# EAGLE board DA16200_Thing_Plus-Panel (EAGLE 9.6.2), part 1 of 6
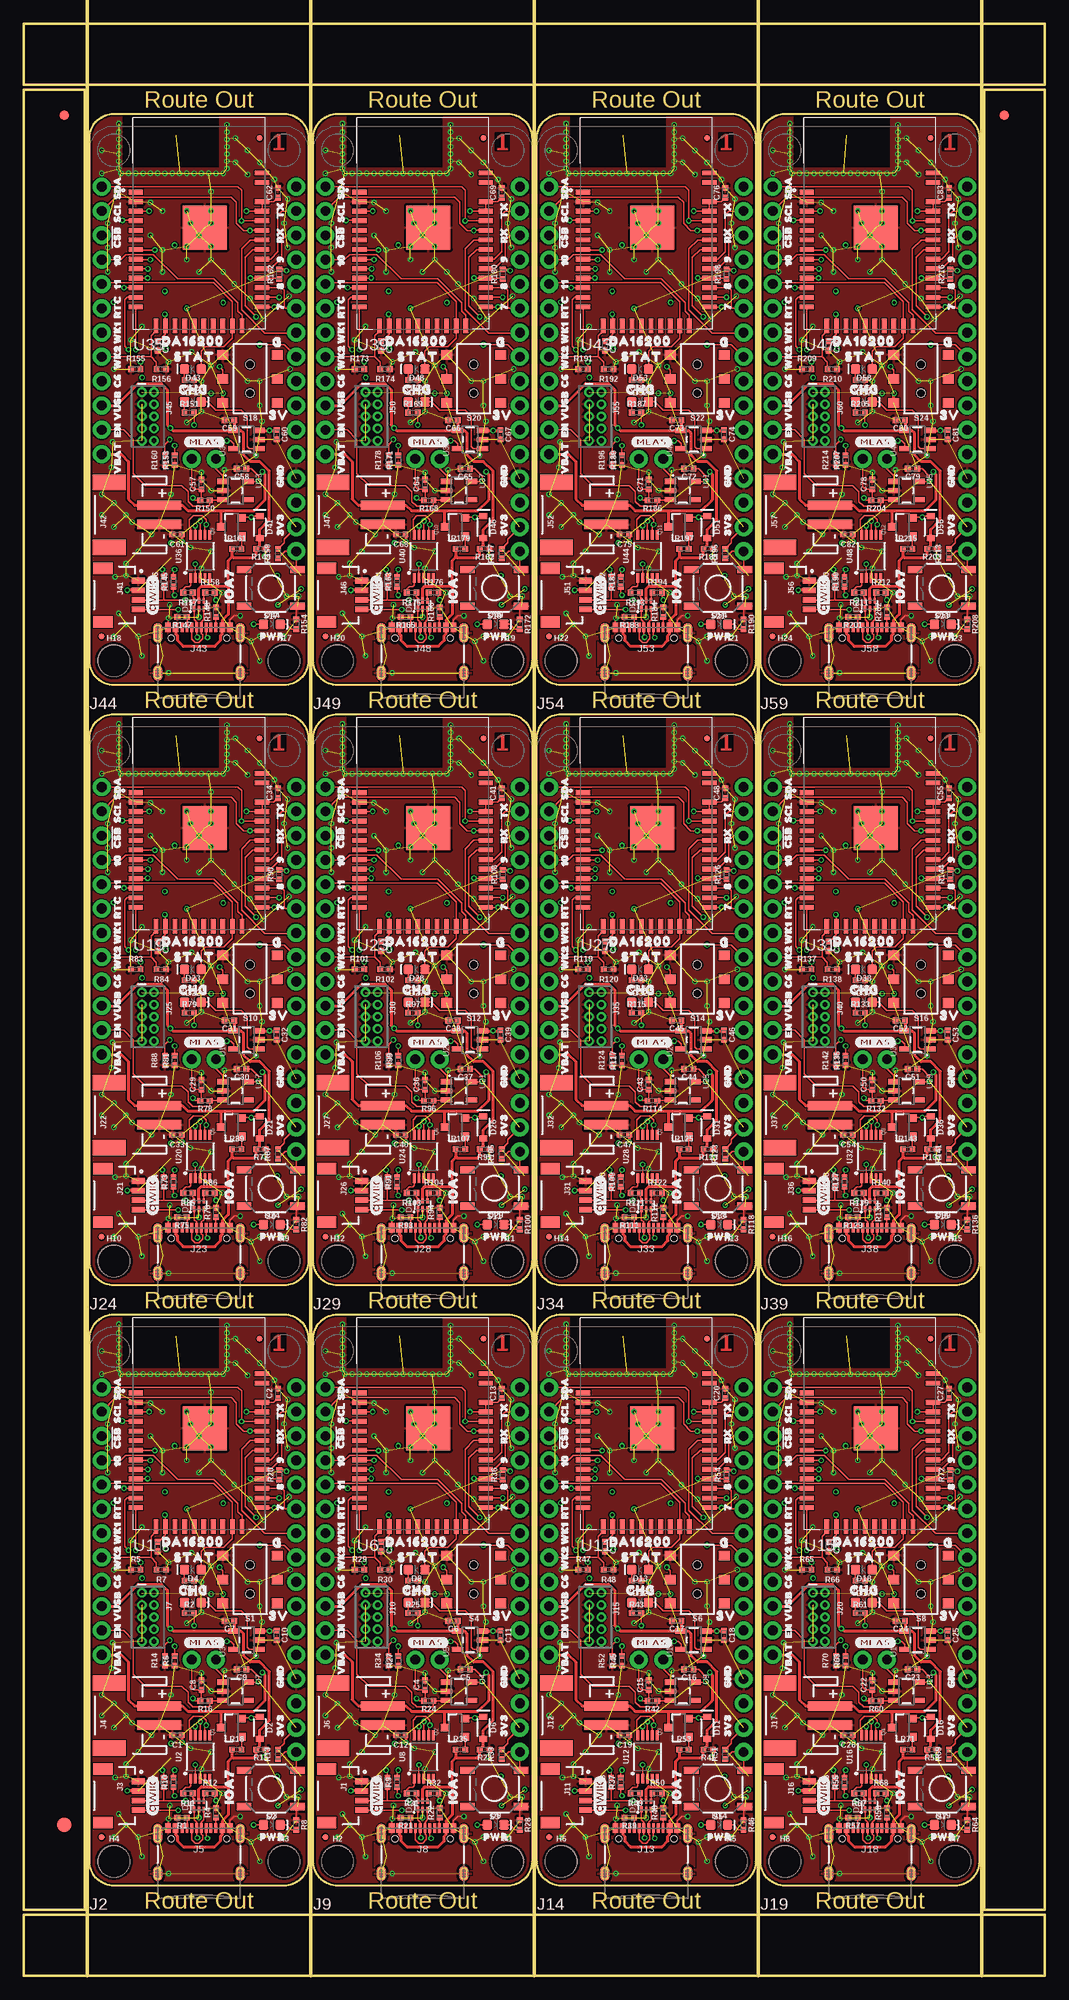
[diagram p0: board, top side]
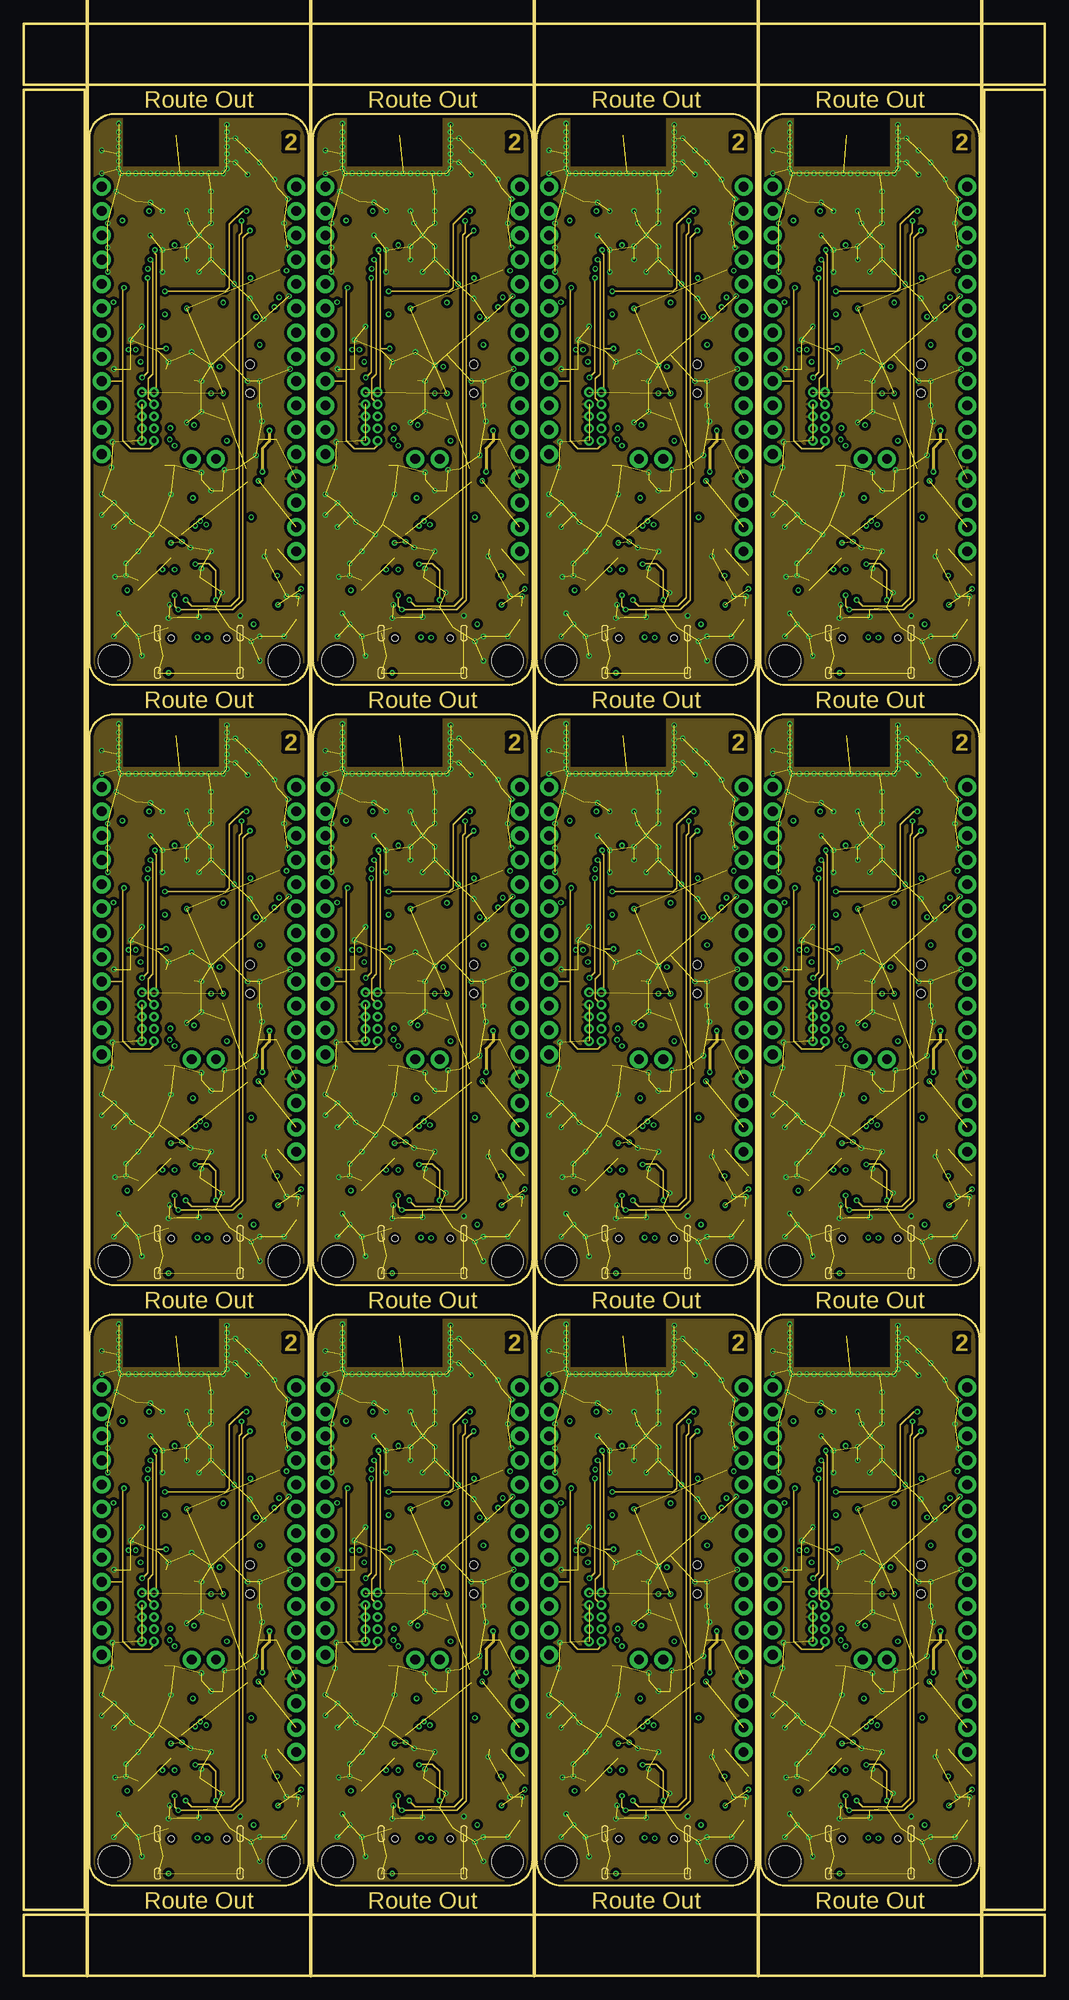
[diagram p1: board, inner layer Route2]
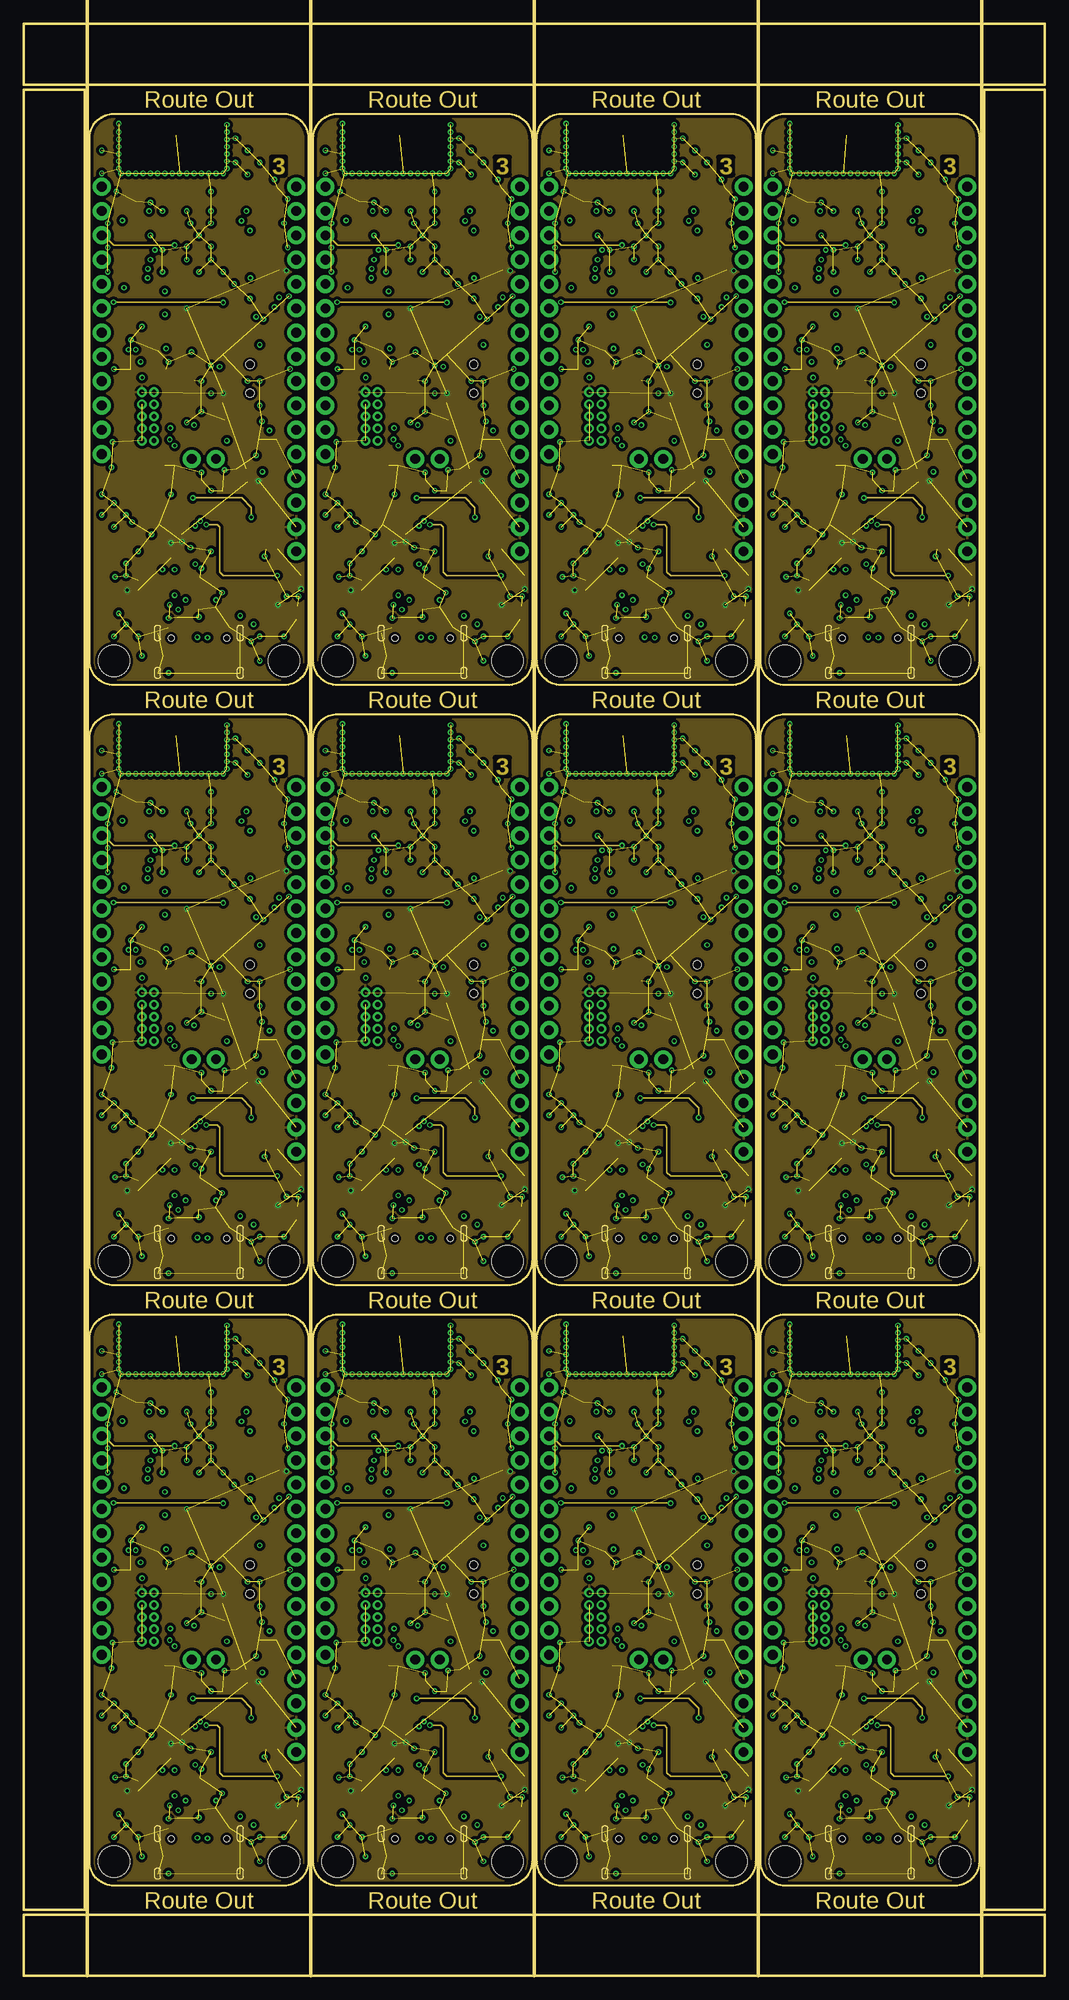
[diagram p2: board, inner layer Route15]
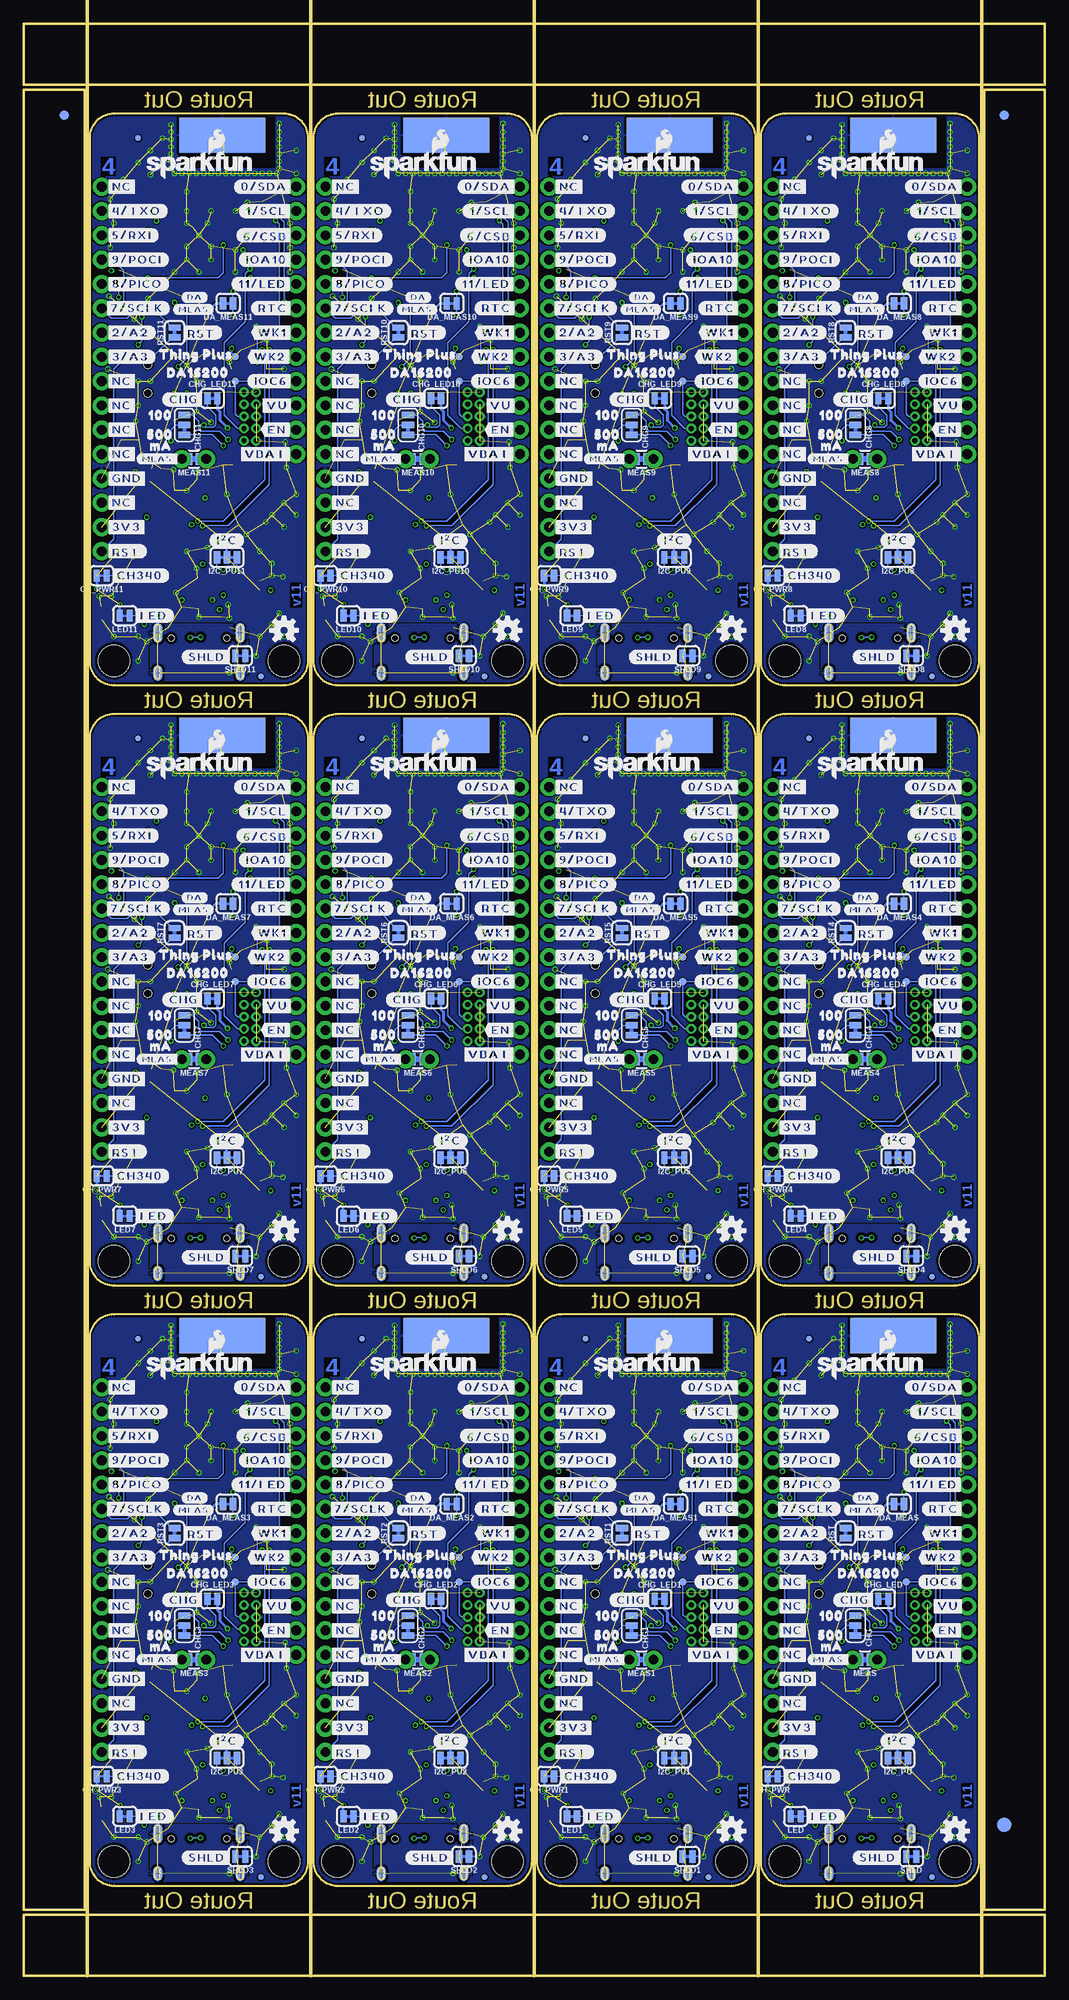
[diagram p3: board, bottom side, seen from below]

Size 106.68 x 203.96 mm. Coordinates in mm from the lower left corner, seen from the top.
Outline: 9.4,69.09 27.18,69.09 arc-90 29.72,66.55 29.72,11.94 arc-90 27.18,9.4 9.4,9.4 arc-90 6.86,11.94 6.86,66.55 arc-90 9.4,69.09
Outline: 32.77,69.09 50.55,69.09 arc-90 53.09,66.55 53.09,11.94 arc-90 50.55,9.4 32.77,9.4 arc-90 30.23,11.94 30.23,66.55 arc-90 32.77,69.09
Outline: 56.13,69.09 73.91,69.09 arc-90 76.45,66.55 76.45,11.94 arc-90 73.91,9.4 56.13,9.4 arc-90 53.59,11.94 53.59,66.55 arc-90 56.13,69.09
Outline: 79.5,69.09 97.28,69.09 arc-90 99.82,66.55 99.82,11.94 arc-90 97.28,9.4 79.5,9.4 arc-90 76.96,11.94 76.96,66.55 arc-90 79.5,69.09
Outline: 9.4,131.83 27.18,131.83 arc-90 29.72,129.29 29.72,74.68 arc-90 27.18,72.14 9.4,72.14 arc-90 6.86,74.68 6.86,129.29 arc-90 9.4,131.83
Outline: 32.77,131.83 50.55,131.83 arc-90 53.09,129.29 53.09,74.68 arc-90 50.55,72.14 32.77,72.14 arc-90 30.23,74.68 30.23,129.29 arc-90 32.77,131.83
Outline: 56.13,131.83 73.91,131.83 arc-90 76.45,129.29 76.45,74.68 arc-90 73.91,72.14 56.13,72.14 arc-90 53.59,74.68 53.59,129.29 arc-90 56.13,131.83
Outline: 79.5,131.83 97.28,131.83 arc-90 99.82,129.29 99.82,74.68 arc-90 97.28,72.14 79.5,72.14 arc-90 76.96,74.68 76.96,129.29 arc-90 79.5,131.83
Outline: 9.4,194.56 27.18,194.56 arc-90 29.72,192.02 29.72,137.41 arc-90 27.18,134.87 9.4,134.87 arc-90 6.86,137.41 6.86,192.02 arc-90 9.4,194.56
Outline: 32.77,194.56 50.55,194.56 arc-90 53.09,192.02 53.09,137.41 arc-90 50.55,134.87 32.77,134.87 arc-90 30.23,137.41 30.23,192.02 arc-90 32.77,194.56
Outline: 56.13,194.56 73.91,194.56 arc-90 76.45,192.02 76.45,137.41 arc-90 73.91,134.87 56.13,134.87 arc-90 53.59,137.41 53.59,192.02 arc-90 56.13,194.56
Outline: 79.5,194.56 97.28,194.56 arc-90 99.82,192.02 99.82,137.41 arc-90 97.28,134.87 79.5,134.87 arc-90 76.96,137.41 76.96,192.02 arc-90 79.5,194.56
Outline: 0,6.35 106.68,6.35 106.68,0 0,0 0,6.35
Outline: 100.33,197.1 106.68,197.1 106.68,6.86 100.33,6.86 100.33,197.1
Outline: 0,203.96 106.68,203.96 106.68,197.61 0,197.61 0,203.96
Outline: 0,197.1 6.35,197.1 6.35,6.86 0,6.86 0,197.1
Copper layers (1*2*15*16): Top 0.035559375mm / dielectric 0.47751875mm / Route2 0.035559375mm / dielectric 0.47751875mm / Route15 0.035559375mm / dielectric 0.47751875mm / Bottom 0.035559375mm
Design rules "DA16200_Thing_Plus": minimum track width 5mil, minimum drill 0.2mm, track to track 5mil, track to pad 5mil, pad to pad 5mil, via to via 5mil, smd to smd 5mil, copper to edge 7mil, drill to drill 7mil, minimum pad ring 5mil, minimum via ring 5mil, stop-mask expansion 2.5mil, vias tented up to drill 25mil, thermal gap 10mil
Net classes: 0 default: width 0 mm, drill 0 mm
Milling: 5 lines

## Footprints (pad centres in the part's own frame; a part is rotated, then mirrored left to right if it is on the bottom)
0402-TIGHT = smd 0.6 x 0.6: 1 -0.5,0; 2 0.5,0
SMT-JUMPER_2_NC_TRACE_SILK = smd 0.66 x 1.27: 1 -0.521,0; 2 0.521,0
SMT-JUMPER_3_1-NC_TRACE_SILK = smd 0.66 x 1.27: 1 -1.041,0; 2 0,0; 3 1.041,0
LED-0603 = smd 1 x 1: A -0.877,0; C 0.877,0
SOD-323 = smd 0.63 x 0.83: A 1.15,0; C -1.15,0
SOT886 = smd 0.61 x 0.25: 1 -0.405,0.5 | smd 0.56 x 0.25: 2 -0.43,0; 3 -0.43,-0.5; 4 0.43,-0.5; 5 0.43,0; 6 0.43,0.5
FIDUCIAL-1X2 = smd 1 x 1: 1 0,0
FIDUCIAL-1.5X3 = smd 1.5 x 1.5: 1 0,0
FIDUCIAL-MICRO = smd 0.635 x 0.635: 1 0,0
PAD.03X.03 = smd 0.762 x 0.762: 1 0,0
STAND-OFF = hole 3.302: 0,0
SMT-JUMPER_3_2-NC_TRACE_SILK = smd 0.66 x 1.27: 1 -1.041,0; 2 0,0; 3 1.041,0
JST04_1MM_RA = smd 0.6 x 1.35: 1 -1.5,0; 2 -0.5,0; 3 0.5,0; 4 1.5,0 | smd 1.2 x 2: NC1 2.8,-3.675; NC2 -2.8,-3.675
THING_PLUS = drill 1.016 pad 1.88: 1 1.27,52.07; 2 1.27,49.53; 3 1.27,46.99; 4 1.27,44.45; 5 1.27,41.91; 6 1.27,39.37; 7 1.27,36.83; 8 1.27,34.29; 9 1.27,31.75; 10 1.27,29.21; 11 1.27,26.67; 12 1.27,24.13; 13 21.59,52.07; 14 21.59,49.53; 15 21.59,46.99; 16 21.59,44.45; 17 21.59,41.91; 18 21.59,39.37; 19 21.59,36.83; 20 21.59,34.29; 21 21.59,31.75; 22 21.59,29.21; 23 21.59,26.67; 24 21.59,24.13; 25 21.59,21.59; 26 21.59,19.05; 27 21.59,16.51; 28 21.59,13.97
JST-2-SMD = smd 1 x 4.6: 1 -1,-3.7; 2 1,-3.7 | smd 1.6 x 3.4: NC1 -3.4,1.5; NC2 3.4,1.5
USB-C-16P-4LAYER-ISOLATED = smd 0.3 x 1: A5 -1.25,-0.34; A6 -0.25,-0.34; A7 0.25,-0.34; A8 1.25,-0.34; B5 1.75,-0.34; B6 0.75,-0.34; B7 -0.75,-0.34; B8 -1.75,-0.34 | smd 0.6 x 1: GND -3.225,-0.34; GND2 3.225,-0.34; VBUS1 -2.45,-0.34; VBUS2 2.45,-0.34 | smd 1 x 2.1: SHLD1 -4.32,-0.915; SHLD2 4.32,-0.915 | smd 1 x 2.1 bottom: SHLD3 -4.32,-0.915; SHLD4 4.32,-0.915 | smd 1 x 1.6: SHLD5 -4.32,-5.095; SHLD8 4.32,-5.095 | smd 1 x 1.6 bottom: SHLD6 -4.32,-5.095; SHLD7 4.32,-5.095 | hole 0.65: -2.89,-1.445; 2.89,-1.445
2X5-PTH-1.27MM-NO_SILK = drill 0.508 pad 1: 1 -2.54,-0.635; 2 -2.54,0.635; 3 -1.27,-0.635; 4 -1.27,0.635; 5 0,-0.635; 6 0,0.635; 7 1.27,-0.635; 8 1.27,0.635; 9 2.54,-0.635; 10 2.54,0.635
COMBO-JUMPER_2_NC_TRACE = smd 0.635 x 1.27: 1 -0.508,0; 2 0.508,0 | drill 1.016 pad 1.88: 3 -1.27,0; 4 1.27,0
SOT23-3 = smd 0.8 x 0.9: 1 -0.95,-1; 2 0.95,-1; 3 0,1.1
SWITCH_DPDT_SMD_AYZ0202 = smd 1 x 1.15: 1 -2.5,2.825; 2 0,2.825; 3 2.5,2.825; 4 -2.5,-2.825; 5 0,-2.825; 6 2.5,-2.825 | hole 0.85: 1.5,0; -1.5,0
TACTILE_SWITCH_SMD_5.2MM = smd 1.524 x 0.762: 1 -2.794,1.905; 2 2.794,1.905; 3 -2.794,-1.905; 4 2.794,-1.905
XCVR_DA16200MOD-AAC4WA32 = smd 1.5 x 0.5: 1 -6.6,3.25; 2 -6.6,2.25; 3 -6.6,1.25; 4 -6.6,0.25; 5 -6.6,-0.75; 6 -6.6,-1.75; 7 -6.6,-2.75; 8 -6.6,-3.75; 9 -6.6,-4.75; 10 -6.6,-5.75; 11 -6.6,-6.75; 12 -6.6,-7.75; 13 -6.6,-8.75; 24 6.6,-8.75; 25 6.6,-7.75; 26 6.6,-6.75; 27 6.6,-5.75; 28 6.6,-4.75; 29 6.6,-3.75; 30 6.6,-2.75; 31 6.6,-1.75; 32 6.6,-0.75; 33 6.6,0.25; 34 6.6,1.25; 35 6.6,2.25; 36 6.6,4.25; 37 6.6,5.25 | smd 0.5 x 1.5: 14 -4.5,-10.75; 15 -3.5,-10.75; 16 -2.5,-10.75; 17 -1.5,-10.75; 18 -0.5,-10.75; 19 0.5,-10.75; 20 1.5,-10.75; 21 2.5,-10.75; 22 3.5,-10.75; 23 4.5,-10.75 | smd 9 x 3.7 bottom: ANT_GND -2.45,9.2 | smd 4.6 x 4.6: GND 0.61,-0.45
MSOP10 = smd 1 x 0.3: 1 -2.25,1; 2 -2.25,0.5; 3 -2.25,0; 4 -2.25,-0.5; 5 -2.25,-1; 6 2.25,-1; 7 2.25,-0.5; 8 2.25,0; 9 2.25,0.5; 10 2.25,1
SOT23-5 = smd 0.55 x 1.2: 1 -0.95,-1.3; 2 0,-1.3; 3 0.95,-1.3; 4 0.95,1.3; 5 -0.95,1.3

## Placement (x,y rotation side)
C1  0.1uF  [0402-TIGHT]  16,25.15 180 top
C2  0.1uF  [0402-TIGHT]  26.54,60.83 90 top
C3  0.1uF  [0402-TIGHT]  13.97,44.83 270 top
C4  1.0uF  [0402-TIGHT]  41.91,30.35 90 top
C5  2.2uF  [0402-TIGHT]  46.1,32 180 top
C6  4.7uF  [0402-TIGHT]  44.83,37.08 180 top
C7  4.7uF  [0402-TIGHT]  21.46,37.08 180 top
C8  1.0uF  [0402-TIGHT]  18.54,30.35 90 top
C9  2.2uF  [0402-TIGHT]  22.73,32 180 top
C10  4.7uF  [0402-TIGHT]  26.42,35.56 270 top
C11  4.7uF  [0402-TIGHT]  49.78,35.56 270 top
C12  0.1uF  [0402-TIGHT]  39.37,25.15 180 top
C13  0.1uF  [0402-TIGHT]  49.91,60.83 90 top
C14  0.1uF  [0402-TIGHT]  37.34,44.83 270 top
C15  1.0uF  [0402-TIGHT]  65.28,30.35 90 top
C16  2.2uF  [0402-TIGHT]  69.47,32 180 top
C17  4.7uF  [0402-TIGHT]  68.2,37.08 180 top
C18  4.7uF  [0402-TIGHT]  73.15,35.56 270 top
C19  0.1uF  [0402-TIGHT]  62.74,25.15 180 top
C20  0.1uF  [0402-TIGHT]  73.28,60.83 90 top
C21  0.1uF  [0402-TIGHT]  60.71,44.83 270 top
C22  1.0uF  [0402-TIGHT]  88.65,30.35 90 top
C23  2.2uF  [0402-TIGHT]  92.84,32 180 top
C24  4.7uF  [0402-TIGHT]  91.57,37.08 180 top
C25  4.7uF  [0402-TIGHT]  96.52,35.56 270 top
C26  0.1uF  [0402-TIGHT]  86.11,25.15 180 top
C27  0.1uF  [0402-TIGHT]  96.65,60.83 90 top
C28  0.1uF  [0402-TIGHT]  84.07,44.83 270 top
C29  1.0uF  [0402-TIGHT]  18.54,93.09 90 top
C30  2.2uF  [0402-TIGHT]  22.73,94.74 180 top
C31  4.7uF  [0402-TIGHT]  21.46,99.82 180 top
C32  4.7uF  [0402-TIGHT]  26.42,98.3 270 top
C33  0.1uF  [0402-TIGHT]  16,87.88 180 top
C34  0.1uF  [0402-TIGHT]  26.54,123.57 90 top
C35  0.1uF  [0402-TIGHT]  13.97,107.57 270 top
C36  1.0uF  [0402-TIGHT]  41.91,93.09 90 top
C37  2.2uF  [0402-TIGHT]  46.1,94.74 180 top
C38  4.7uF  [0402-TIGHT]  44.83,99.82 180 top
C39  4.7uF  [0402-TIGHT]  49.78,98.3 270 top
C40  0.1uF  [0402-TIGHT]  39.37,87.88 180 top
C41  0.1uF  [0402-TIGHT]  49.91,123.57 90 top
C42  0.1uF  [0402-TIGHT]  37.34,107.57 270 top
C43  1.0uF  [0402-TIGHT]  65.28,93.09 90 top
C44  2.2uF  [0402-TIGHT]  69.47,94.74 180 top
C45  4.7uF  [0402-TIGHT]  68.2,99.82 180 top
C46  4.7uF  [0402-TIGHT]  73.15,98.3 270 top
C47  0.1uF  [0402-TIGHT]  62.74,87.88 180 top
C48  0.1uF  [0402-TIGHT]  73.28,123.57 90 top
C49  0.1uF  [0402-TIGHT]  60.71,107.57 270 top
C50  1.0uF  [0402-TIGHT]  88.65,93.09 90 top
C51  2.2uF  [0402-TIGHT]  92.84,94.74 180 top
C52  4.7uF  [0402-TIGHT]  91.57,99.82 180 top
C53  4.7uF  [0402-TIGHT]  96.52,98.3 270 top
C54  0.1uF  [0402-TIGHT]  86.11,87.88 180 top
C55  0.1uF  [0402-TIGHT]  96.65,123.57 90 top
C56  0.1uF  [0402-TIGHT]  84.07,107.57 270 top
C57  1.0uF  [0402-TIGHT]  18.54,155.83 90 top
C58  2.2uF  [0402-TIGHT]  22.73,157.48 180 top
C59  4.7uF  [0402-TIGHT]  21.46,162.56 180 top
C60  4.7uF  [0402-TIGHT]  26.42,161.04 270 top
C61  0.1uF  [0402-TIGHT]  16,150.62 180 top
C62  0.1uF  [0402-TIGHT]  26.54,186.31 90 top
C63  0.1uF  [0402-TIGHT]  13.97,170.31 270 top
C64  1.0uF  [0402-TIGHT]  41.91,155.83 90 top
C65  2.2uF  [0402-TIGHT]  46.1,157.48 180 top
C66  4.7uF  [0402-TIGHT]  44.83,162.56 180 top
C67  4.7uF  [0402-TIGHT]  49.78,161.04 270 top
C68  0.1uF  [0402-TIGHT]  39.37,150.62 180 top
C69  0.1uF  [0402-TIGHT]  49.91,186.31 90 top
C70  0.1uF  [0402-TIGHT]  37.34,170.31 270 top
C71  1.0uF  [0402-TIGHT]  65.28,155.83 90 top
C72  2.2uF  [0402-TIGHT]  69.47,157.48 180 top
C73  4.7uF  [0402-TIGHT]  68.2,162.56 180 top
C74  4.7uF  [0402-TIGHT]  73.15,161.04 270 top
C75  0.1uF  [0402-TIGHT]  62.74,150.62 180 top
C76  0.1uF  [0402-TIGHT]  73.28,186.31 90 top
C77  0.1uF  [0402-TIGHT]  60.71,170.31 270 top
C78  1.0uF  [0402-TIGHT]  88.65,155.83 90 top
C79  2.2uF  [0402-TIGHT]  92.84,157.48 180 top
C80  4.7uF  [0402-TIGHT]  91.57,162.56 180 top
C81  4.7uF  [0402-TIGHT]  96.52,161.04 270 top
C82  0.1uF  [0402-TIGHT]  86.11,150.62 180 top
C83  0.1uF  [0402-TIGHT]  96.65,186.31 90 top
C84  0.1uF  [0402-TIGHT]  84.07,170.31 270 top
CH_PWR  JUMPER-SMT_2_NC_TRACE_SILK  [SMT-JUMPER_2_NC_TRACE_SILK]  28.45,20.83 180 bottom
CH_PWR1  JUMPER-SMT_2_NC_TRACE_SILK  [SMT-JUMPER_2_NC_TRACE_SILK]  51.82,20.83 180 bottom
CH_PWR2  JUMPER-SMT_2_NC_TRACE_SILK  [SMT-JUMPER_2_NC_TRACE_SILK]  75.18,20.83 180 bottom
CH_PWR3  JUMPER-SMT_2_NC_TRACE_SILK  [SMT-JUMPER_2_NC_TRACE_SILK]  98.55,20.83 180 bottom
CH_PWR4  JUMPER-SMT_2_NC_TRACE_SILK  [SMT-JUMPER_2_NC_TRACE_SILK]  28.45,83.57 180 bottom
CH_PWR5  JUMPER-SMT_2_NC_TRACE_SILK  [SMT-JUMPER_2_NC_TRACE_SILK]  51.82,83.57 180 bottom
CH_PWR6  JUMPER-SMT_2_NC_TRACE_SILK  [SMT-JUMPER_2_NC_TRACE_SILK]  75.18,83.57 180 bottom
CH_PWR7  JUMPER-SMT_2_NC_TRACE_SILK  [SMT-JUMPER_2_NC_TRACE_SILK]  98.55,83.57 180 bottom
CH_PWR8  JUMPER-SMT_2_NC_TRACE_SILK  [SMT-JUMPER_2_NC_TRACE_SILK]  28.45,146.3 180 bottom
CH_PWR9  JUMPER-SMT_2_NC_TRACE_SILK  [SMT-JUMPER_2_NC_TRACE_SILK]  51.82,146.3 180 bottom
CH_PWR10  JUMPER-SMT_2_NC_TRACE_SILK  [SMT-JUMPER_2_NC_TRACE_SILK]  75.18,146.3 180 bottom
CH_PWR11  JUMPER-SMT_2_NC_TRACE_SILK  [SMT-JUMPER_2_NC_TRACE_SILK]  98.55,146.3 180 bottom
CHG  JUMPER-SMT_3_1-NC_TRACE_SILK  [SMT-JUMPER_3_1-NC_TRACE_SILK]  19.81,36.58 270 bottom
CHG1  JUMPER-SMT_3_1-NC_TRACE_SILK  [SMT-JUMPER_3_1-NC_TRACE_SILK]  43.18,36.58 270 bottom
CHG2  JUMPER-SMT_3_1-NC_TRACE_SILK  [SMT-JUMPER_3_1-NC_TRACE_SILK]  66.55,36.58 270 bottom
CHG3  JUMPER-SMT_3_1-NC_TRACE_SILK  [SMT-JUMPER_3_1-NC_TRACE_SILK]  89.92,36.58 270 bottom
CHG4  JUMPER-SMT_3_1-NC_TRACE_SILK  [SMT-JUMPER_3_1-NC_TRACE_SILK]  19.81,99.31 270 bottom
CHG5  JUMPER-SMT_3_1-NC_TRACE_SILK  [SMT-JUMPER_3_1-NC_TRACE_SILK]  43.18,99.31 270 bottom
CHG6  JUMPER-SMT_3_1-NC_TRACE_SILK  [SMT-JUMPER_3_1-NC_TRACE_SILK]  66.55,99.31 270 bottom
CHG7  JUMPER-SMT_3_1-NC_TRACE_SILK  [SMT-JUMPER_3_1-NC_TRACE_SILK]  89.92,99.31 270 bottom
CHG8  JUMPER-SMT_3_1-NC_TRACE_SILK  [SMT-JUMPER_3_1-NC_TRACE_SILK]  19.81,162.05 270 bottom
CHG9  JUMPER-SMT_3_1-NC_TRACE_SILK  [SMT-JUMPER_3_1-NC_TRACE_SILK]  43.18,162.05 270 bottom
CHG10  JUMPER-SMT_3_1-NC_TRACE_SILK  [SMT-JUMPER_3_1-NC_TRACE_SILK]  66.55,162.05 270 bottom
CHG11  JUMPER-SMT_3_1-NC_TRACE_SILK  [SMT-JUMPER_3_1-NC_TRACE_SILK]  89.92,162.05 270 bottom
CHG_LED  JUMPER-SMT_2_NC_TRACE_SILK  [SMT-JUMPER_2_NC_TRACE_SILK]  16.89,39.37 0 bottom
CHG_LED1  JUMPER-SMT_2_NC_TRACE_SILK  [SMT-JUMPER_2_NC_TRACE_SILK]  40.26,39.37 0 bottom
CHG_LED2  JUMPER-SMT_2_NC_TRACE_SILK  [SMT-JUMPER_2_NC_TRACE_SILK]  63.63,39.37 0 bottom
CHG_LED3  JUMPER-SMT_2_NC_TRACE_SILK  [SMT-JUMPER_2_NC_TRACE_SILK]  87,39.37 0 bottom
CHG_LED4  JUMPER-SMT_2_NC_TRACE_SILK  [SMT-JUMPER_2_NC_TRACE_SILK]  16.89,102.11 0 bottom
CHG_LED5  JUMPER-SMT_2_NC_TRACE_SILK  [SMT-JUMPER_2_NC_TRACE_SILK]  40.26,102.11 0 bottom
CHG_LED6  JUMPER-SMT_2_NC_TRACE_SILK  [SMT-JUMPER_2_NC_TRACE_SILK]  63.63,102.11 0 bottom
CHG_LED7  JUMPER-SMT_2_NC_TRACE_SILK  [SMT-JUMPER_2_NC_TRACE_SILK]  87,102.11 0 bottom
CHG_LED8  JUMPER-SMT_2_NC_TRACE_SILK  [SMT-JUMPER_2_NC_TRACE_SILK]  16.89,164.85 0 bottom
CHG_LED9  JUMPER-SMT_2_NC_TRACE_SILK  [SMT-JUMPER_2_NC_TRACE_SILK]  40.26,164.85 0 bottom
CHG_LED10  JUMPER-SMT_2_NC_TRACE_SILK  [SMT-JUMPER_2_NC_TRACE_SILK]  63.63,164.85 0 bottom
CHG_LED11  JUMPER-SMT_2_NC_TRACE_SILK  [SMT-JUMPER_2_NC_TRACE_SILK]  87,164.85 0 bottom
D1  Yellow  [LED-0603]  17.65,38.99 0 top
D2  1A/23V/620mV  [SOD-323]  24.64,25.91 270 top
D3  RED  [LED-0603]  25.91,15.75 0 top
D4  BLUE  [LED-0603]  17.65,42.42 180 top
D5  PRTR5V0U2F  [SOT886]  18.29,17.78 90 top
D6  1A/23V/620mV  [SOD-323]  48.01,25.91 270 top
D7  Yellow  [LED-0603]  41.02,38.99 0 top
D8  BLUE  [LED-0603]  41.02,42.42 180 top
D9  RED  [LED-0603]  49.28,15.75 0 top
D10  PRTR5V0U2F  [SOT886]  41.66,17.78 90 top
D11  1A/23V/620mV  [SOD-323]  71.37,25.91 270 top
D12  Yellow  [LED-0603]  64.39,38.99 0 top
D13  BLUE  [LED-0603]  64.39,42.42 180 top
D14  RED  [LED-0603]  72.64,15.75 0 top
D15  PRTR5V0U2F  [SOT886]  65.02,17.78 90 top
D16  1A/23V/620mV  [SOD-323]  94.74,25.91 270 top
D17  Yellow  [LED-0603]  87.76,38.99 0 top
D18  BLUE  [LED-0603]  87.76,42.42 180 top
D19  RED  [LED-0603]  96.01,15.75 0 top
D20  PRTR5V0U2F  [SOT886]  88.39,17.78 90 top
D21  1A/23V/620mV  [SOD-323]  24.64,88.65 270 top
D22  Yellow  [LED-0603]  17.65,101.73 0 top
D23  BLUE  [LED-0603]  17.65,105.16 180 top
D24  RED  [LED-0603]  25.91,78.49 0 top
D25  PRTR5V0U2F  [SOT886]  18.29,80.52 90 top
D26  1A/23V/620mV  [SOD-323]  48.01,88.65 270 top
D27  Yellow  [LED-0603]  41.02,101.73 0 top
D28  BLUE  [LED-0603]  41.02,105.16 180 top
D29  RED  [LED-0603]  49.28,78.49 0 top
D30  PRTR5V0U2F  [SOT886]  41.66,80.52 90 top
D31  1A/23V/620mV  [SOD-323]  71.37,88.65 270 top
D32  Yellow  [LED-0603]  64.39,101.73 0 top
D33  BLUE  [LED-0603]  64.39,105.16 180 top
D34  RED  [LED-0603]  72.64,78.49 0 top
D35  PRTR5V0U2F  [SOT886]  65.02,80.52 90 top
D36  1A/23V/620mV  [SOD-323]  94.74,88.65 270 top
D37  Yellow  [LED-0603]  87.76,101.73 0 top
D38  BLUE  [LED-0603]  87.76,105.16 180 top
D39  RED  [LED-0603]  96.01,78.49 0 top
D40  PRTR5V0U2F  [SOT886]  88.39,80.52 90 top
D41  1A/23V/620mV  [SOD-323]  24.64,151.38 270 top
D42  Yellow  [LED-0603]  17.65,164.47 0 top
D43  BLUE  [LED-0603]  17.65,167.89 180 top
D44  RED  [LED-0603]  25.91,141.22 0 top
D45  PRTR5V0U2F  [SOT886]  18.29,143.26 90 top
D46  1A/23V/620mV  [SOD-323]  48.01,151.38 270 top
D47  Yellow  [LED-0603]  41.02,164.47 0 top
D48  BLUE  [LED-0603]  41.02,167.89 180 top
D49  RED  [LED-0603]  49.28,141.22 0 top
D50  PRTR5V0U2F  [SOT886]  41.66,143.26 90 top
D51  1A/23V/620mV  [SOD-323]  71.37,151.38 270 top
D52  Yellow  [LED-0603]  64.39,164.47 0 top
D53  BLUE  [LED-0603]  64.39,167.89 180 top
D54  RED  [LED-0603]  72.64,141.22 0 top
D55  PRTR5V0U2F  [SOT886]  65.02,143.26 90 top
D56  1A/23V/620mV  [SOD-323]  94.74,151.38 270 top
D57  Yellow  [LED-0603]  87.76,164.47 0 top
D58  BLUE  [LED-0603]  87.76,167.89 180 top
D59  RED  [LED-0603]  96.01,141.22 0 top
D60  PRTR5V0U2F  [SOT886]  88.39,143.26 90 top
DA_MEAS  JUMPER-SMT_2_NC_TRACE_SILK  [SMT-JUMPER_2_NC_TRACE_SILK]  15.24,49.28 180 bottom
DA_MEAS1  JUMPER-SMT_2_NC_TRACE_SILK  [SMT-JUMPER_2_NC_TRACE_SILK]  38.61,49.28 180 bottom
DA_MEAS2  JUMPER-SMT_2_NC_TRACE_SILK  [SMT-JUMPER_2_NC_TRACE_SILK]  61.98,49.28 180 bottom
DA_MEAS3  JUMPER-SMT_2_NC_TRACE_SILK  [SMT-JUMPER_2_NC_TRACE_SILK]  85.34,49.28 180 bottom
DA_MEAS4  JUMPER-SMT_2_NC_TRACE_SILK  [SMT-JUMPER_2_NC_TRACE_SILK]  15.24,112.01 180 bottom
DA_MEAS5  JUMPER-SMT_2_NC_TRACE_SILK  [SMT-JUMPER_2_NC_TRACE_SILK]  38.61,112.01 180 bottom
DA_MEAS6  JUMPER-SMT_2_NC_TRACE_SILK  [SMT-JUMPER_2_NC_TRACE_SILK]  61.98,112.01 180 bottom
DA_MEAS7  JUMPER-SMT_2_NC_TRACE_SILK  [SMT-JUMPER_2_NC_TRACE_SILK]  85.34,112.01 180 bottom
DA_MEAS8  JUMPER-SMT_2_NC_TRACE_SILK  [SMT-JUMPER_2_NC_TRACE_SILK]  15.24,174.75 180 bottom
DA_MEAS9  JUMPER-SMT_2_NC_TRACE_SILK  [SMT-JUMPER_2_NC_TRACE_SILK]  38.61,174.75 180 bottom
DA_MEAS10  JUMPER-SMT_2_NC_TRACE_SILK  [SMT-JUMPER_2_NC_TRACE_SILK]  61.98,174.75 180 bottom
DA_MEAS11  JUMPER-SMT_2_NC_TRACE_SILK  [SMT-JUMPER_2_NC_TRACE_SILK]  85.34,174.75 180 bottom
E$1  [FIDUCIAL-1X2]  4.23,194.44 0 top
E$2  [FIDUCIAL-1X2]  4.23,194.44 0 bottom
E$3  [FIDUCIAL-1X2]  102.45,194.44 0 top
E$4  [FIDUCIAL-1X2]  102.45,194.44 0 bottom
E$5  [FIDUCIAL-1.5X3]  4.23,15.75 0 top
E$6  [FIDUCIAL-1.5X3]  4.23,15.75 0 bottom
FD1  FIDUCIALUFIDUCIAL  [FIDUCIAL-MICRO]  8.13,14.48 0 top
FD2  FIDUCIALUFIDUCIAL  [FIDUCIAL-MICRO]  24.64,66.55 0 top
FD3  FIDUCIALUFIDUCIAL  [FIDUCIAL-MICRO]  11.81,10.29 0 bottom
FD4  FIDUCIALUFIDUCIAL  [FIDUCIAL-MICRO]  24.64,66.55 0 bottom
FD5  FIDUCIALUFIDUCIAL  [FIDUCIAL-MICRO]  31.5,14.48 0 top
FD6  FIDUCIALUFIDUCIAL  [FIDUCIAL-MICRO]  48.01,66.55 0 top
FD7  FIDUCIALUFIDUCIAL  [FIDUCIAL-MICRO]  35.18,10.29 0 bottom
FD8  FIDUCIALUFIDUCIAL  [FIDUCIAL-MICRO]  48.01,66.55 0 bottom
FD9  FIDUCIALUFIDUCIAL  [FIDUCIAL-MICRO]  54.86,14.48 0 top
FD10  FIDUCIALUFIDUCIAL  [FIDUCIAL-MICRO]  71.37,66.55 0 top
FD11  FIDUCIALUFIDUCIAL  [FIDUCIAL-MICRO]  58.55,10.29 0 bottom
FD12  FIDUCIALUFIDUCIAL  [FIDUCIAL-MICRO]  71.37,66.55 0 bottom
FD13  FIDUCIALUFIDUCIAL  [FIDUCIAL-MICRO]  78.23,14.48 0 top
FD14  FIDUCIALUFIDUCIAL  [FIDUCIAL-MICRO]  94.74,66.55 0 top
FD15  FIDUCIALUFIDUCIAL  [FIDUCIAL-MICRO]  81.92,10.29 0 bottom
FD16  FIDUCIALUFIDUCIAL  [FIDUCIAL-MICRO]  94.74,66.55 0 bottom
FD17  FIDUCIALUFIDUCIAL  [FIDUCIAL-MICRO]  8.13,77.22 0 top
FD18  FIDUCIALUFIDUCIAL  [FIDUCIAL-MICRO]  24.64,129.29 0 top
FD19  FIDUCIALUFIDUCIAL  [FIDUCIAL-MICRO]  11.81,73.03 0 bottom
FD20  FIDUCIALUFIDUCIAL  [FIDUCIAL-MICRO]  24.64,129.29 0 bottom
FD21  FIDUCIALUFIDUCIAL  [FIDUCIAL-MICRO]  31.5,77.22 0 top
FD22  FIDUCIALUFIDUCIAL  [FIDUCIAL-MICRO]  48.01,129.29 0 top
FD23  FIDUCIALUFIDUCIAL  [FIDUCIAL-MICRO]  35.18,73.03 0 bottom
FD24  FIDUCIALUFIDUCIAL  [FIDUCIAL-MICRO]  48.01,129.29 0 bottom
FD25  FIDUCIALUFIDUCIAL  [FIDUCIAL-MICRO]  54.86,77.22 0 top
FD26  FIDUCIALUFIDUCIAL  [FIDUCIAL-MICRO]  71.37,129.29 0 top
FD27  FIDUCIALUFIDUCIAL  [FIDUCIAL-MICRO]  58.55,73.03 0 bottom
FD28  FIDUCIALUFIDUCIAL  [FIDUCIAL-MICRO]  71.37,129.29 0 bottom
FD29  FIDUCIALUFIDUCIAL  [FIDUCIAL-MICRO]  78.23,77.22 0 top
FD30  FIDUCIALUFIDUCIAL  [FIDUCIAL-MICRO]  94.74,129.29 0 top
FD31  FIDUCIALUFIDUCIAL  [FIDUCIAL-MICRO]  81.92,73.03 0 bottom
FD32  FIDUCIALUFIDUCIAL  [FIDUCIAL-MICRO]  94.74,129.29 0 bottom
FD33  FIDUCIALUFIDUCIAL  [FIDUCIAL-MICRO]  8.13,139.95 0 top
FD34  FIDUCIALUFIDUCIAL  [FIDUCIAL-MICRO]  24.64,192.02 0 top
FD35  FIDUCIALUFIDUCIAL  [FIDUCIAL-MICRO]  11.81,135.76 0 bottom
FD36  FIDUCIALUFIDUCIAL  [FIDUCIAL-MICRO]  24.64,192.02 0 bottom
FD37  FIDUCIALUFIDUCIAL  [FIDUCIAL-MICRO]  31.5,139.95 0 top
FD38  FIDUCIALUFIDUCIAL  [FIDUCIAL-MICRO]  48.01,192.02 0 top
FD39  FIDUCIALUFIDUCIAL  [FIDUCIAL-MICRO]  35.18,135.76 0 bottom
FD40  FIDUCIALUFIDUCIAL  [FIDUCIAL-MICRO]  48.01,192.02 0 bottom
FD41  FIDUCIALUFIDUCIAL  [FIDUCIAL-MICRO]  54.86,139.95 0 top
FD42  FIDUCIALUFIDUCIAL  [FIDUCIAL-MICRO]  71.37,192.02 0 top
FD43  FIDUCIALUFIDUCIAL  [FIDUCIAL-MICRO]  58.55,135.76 0 bottom
FD44  FIDUCIALUFIDUCIAL  [FIDUCIAL-MICRO]  71.37,192.02 0 bottom
FD45  FIDUCIALUFIDUCIAL  [FIDUCIAL-MICRO]  78.23,139.95 0 top
FD46  FIDUCIALUFIDUCIAL  [FIDUCIAL-MICRO]  94.74,192.02 0 top
FD47  FIDUCIALUFIDUCIAL  [FIDUCIAL-MICRO]  81.92,135.76 0 bottom
FD48  FIDUCIALUFIDUCIAL  [FIDUCIAL-MICRO]  94.74,192.02 0 bottom
GPIOC1  TEST-POINT3  [PAD.03X.03]  37.85,41.15 0 bottom
GPIOC2  TEST-POINT3  [PAD.03X.03]  61.21,41.15 0 bottom
GPIOC3  TEST-POINT3  [PAD.03X.03]  84.58,41.15 0 bottom
GPIOC4  TEST-POINT3  [PAD.03X.03]  14.48,103.89 0 bottom
GPIOC5  TEST-POINT3  [PAD.03X.03]  37.85,103.89 0 bottom
GPIOC6  TEST-POINT3  [PAD.03X.03]  61.21,103.89 0 bottom
GPIOC7  TEST-POINT3  [PAD.03X.03]  14.48,41.15 0 bottom
GPIOC8  TEST-POINT3  [PAD.03X.03]  84.58,103.89 0 bottom
GPIOC9  TEST-POINT3  [PAD.03X.03]  14.48,166.62 0 bottom
GPIOC10  TEST-POINT3  [PAD.03X.03]  37.85,166.62 0 bottom
GPIOC11  TEST-POINT3  [PAD.03X.03]  61.21,166.62 0 bottom
GPIOC12  TEST-POINT3  [PAD.03X.03]  84.58,166.62 0 bottom
H1  STAND-OFF  [STAND-OFF]  50.55,11.94 0 top
H2  STAND-OFF  [STAND-OFF]  32.77,11.94 0 top
H3  STAND-OFF  [STAND-OFF]  27.18,11.94 0 top
H4  STAND-OFF  [STAND-OFF]  9.4,11.94 0 top
H5  STAND-OFF  [STAND-OFF]  73.91,11.94 0 top
H6  STAND-OFF  [STAND-OFF]  56.13,11.94 0 top
H7  STAND-OFF  [STAND-OFF]  97.28,11.94 0 top
H8  STAND-OFF  [STAND-OFF]  79.5,11.94 0 top
H9  STAND-OFF  [STAND-OFF]  27.18,74.68 0 top
H10  STAND-OFF  [STAND-OFF]  9.4,74.68 0 top
H11  STAND-OFF  [STAND-OFF]  50.55,74.68 0 top
H12  STAND-OFF  [STAND-OFF]  32.77,74.68 0 top
H13  STAND-OFF  [STAND-OFF]  73.91,74.68 0 top
H14  STAND-OFF  [STAND-OFF]  56.13,74.68 0 top
H15  STAND-OFF  [STAND-OFF]  97.28,74.68 0 top
H16  STAND-OFF  [STAND-OFF]  79.5,74.68 0 top
H17  STAND-OFF  [STAND-OFF]  27.18,137.41 0 top
H18  STAND-OFF  [STAND-OFF]  9.4,137.41 0 top
H19  STAND-OFF  [STAND-OFF]  50.55,137.41 0 top
H20  STAND-OFF  [STAND-OFF]  32.77,137.41 0 top
H21  STAND-OFF  [STAND-OFF]  73.91,137.41 0 top
H22  STAND-OFF  [STAND-OFF]  56.13,137.41 0 top
H23  STAND-OFF  [STAND-OFF]  97.28,137.41 0 top
H24  STAND-OFF  [STAND-OFF]  79.5,137.41 0 top
I2C_PU  JUMPER-SMT_3_2-NC_TRACE_SILK  [SMT-JUMPER_3_2-NC_TRACE_SILK]  15.37,22.73 180 bottom
I2C_PU1  JUMPER-SMT_3_2-NC_TRACE_SILK  [SMT-JUMPER_3_2-NC_TRACE_SILK]  38.73,22.73 180 bottom
I2C_PU2  JUMPER-SMT_3_2-NC_TRACE_SILK  [SMT-JUMPER_3_2-NC_TRACE_SILK]  62.1,22.73 180 bottom
I2C_PU3  JUMPER-SMT_3_2-NC_TRACE_SILK  [SMT-JUMPER_3_2-NC_TRACE_SILK]  85.47,22.73 180 bottom
I2C_PU4  JUMPER-SMT_3_2-NC_TRACE_SILK  [SMT-JUMPER_3_2-NC_TRACE_SILK]  15.37,85.47 180 bottom
I2C_PU5  JUMPER-SMT_3_2-NC_TRACE_SILK  [SMT-JUMPER_3_2-NC_TRACE_SILK]  38.73,85.47 180 bottom
I2C_PU6  JUMPER-SMT_3_2-NC_TRACE_SILK  [SMT-JUMPER_3_2-NC_TRACE_SILK]  62.1,85.47 180 bottom
I2C_PU7  JUMPER-SMT_3_2-NC_TRACE_SILK  [SMT-JUMPER_3_2-NC_TRACE_SILK]  85.47,85.47 180 bottom
I2C_PU8  JUMPER-SMT_3_2-NC_TRACE_SILK  [SMT-JUMPER_3_2-NC_TRACE_SILK]  15.37,148.21 180 bottom
I2C_PU9  JUMPER-SMT_3_2-NC_TRACE_SILK  [SMT-JUMPER_3_2-NC_TRACE_SILK]  38.73,148.21 180 bottom
I2C_PU10  JUMPER-SMT_3_2-NC_TRACE_SILK  [SMT-JUMPER_3_2-NC_TRACE_SILK]  62.1,148.21 180 bottom
I2C_PU11  JUMPER-SMT_3_2-NC_TRACE_SILK  [SMT-JUMPER_3_2-NC_TRACE_SILK]  85.47,148.21 180 bottom
J1  Qwiic  [JST04_1MM_RA]  35.31,18.8 270 top
J2  THING_PLUS  [THING_PLUS]  6.86,9.4 0 top
J3  Qwiic  [JST04_1MM_RA]  11.94,18.8 270 top
J4  [JST-2-SMD]  10.41,27.18 90 top
J5  USB C  [USB-C-16P-4LAYER-ISOLATED]  18.29,15.75 0 top
J6  [JST-2-SMD]  33.78,27.18 90 top
J7  CORTEX_JTAG_DEBUG_PTH_NS  [2X5-PTH-1.27MM-NO_SILK]  12.95,37.47 270 top
J8  USB C  [USB-C-16P-4LAYER-ISOLATED]  41.66,15.75 0 top
J9  THING_PLUS  [THING_PLUS]  30.23,9.4 0 top
J10  CORTEX_JTAG_DEBUG_PTH_NS  [2X5-PTH-1.27MM-NO_SILK]  36.32,37.47 270 top
J11  Qwiic  [JST04_1MM_RA]  58.67,18.8 270 top
J12  [JST-2-SMD]  57.15,27.18 90 top
J13  USB C  [USB-C-16P-4LAYER-ISOLATED]  65.02,15.75 0 top
J14  THING_PLUS  [THING_PLUS]  53.59,9.4 0 top
J15  CORTEX_JTAG_DEBUG_PTH_NS  [2X5-PTH-1.27MM-NO_SILK]  59.69,37.47 270 top
J16  Qwiic  [JST04_1MM_RA]  82.04,18.8 270 top
J17  [JST-2-SMD]  80.52,27.18 90 top
J18  USB C  [USB-C-16P-4LAYER-ISOLATED]  88.39,15.75 0 top
J19  THING_PLUS  [THING_PLUS]  76.96,9.4 0 top
J20  CORTEX_JTAG_DEBUG_PTH_NS  [2X5-PTH-1.27MM-NO_SILK]  83.06,37.47 270 top
J21  Qwiic  [JST04_1MM_RA]  11.94,81.53 270 top
J22  [JST-2-SMD]  10.41,89.92 90 top
J23  USB C  [USB-C-16P-4LAYER-ISOLATED]  18.29,78.49 0 top
J24  THING_PLUS  [THING_PLUS]  6.86,72.14 0 top
J25  CORTEX_JTAG_DEBUG_PTH_NS  [2X5-PTH-1.27MM-NO_SILK]  12.95,100.2 270 top
J26  Qwiic  [JST04_1MM_RA]  35.31,81.53 270 top
J27  [JST-2-SMD]  33.78,89.92 90 top
J28  USB C  [USB-C-16P-4LAYER-ISOLATED]  41.66,78.49 0 top
J29  THING_PLUS  [THING_PLUS]  30.23,72.14 0 top
J30  CORTEX_JTAG_DEBUG_PTH_NS  [2X5-PTH-1.27MM-NO_SILK]  36.32,100.2 270 top
J31  Qwiic  [JST04_1MM_RA]  58.67,81.53 270 top
J32  [JST-2-SMD]  57.15,89.92 90 top
J33  USB C  [USB-C-16P-4LAYER-ISOLATED]  65.02,78.49 0 top
J34  THING_PLUS  [THING_PLUS]  53.59,72.14 0 top
J35  CORTEX_JTAG_DEBUG_PTH_NS  [2X5-PTH-1.27MM-NO_SILK]  59.69,100.2 270 top
J36  Qwiic  [JST04_1MM_RA]  82.04,81.53 270 top
J37  [JST-2-SMD]  80.52,89.92 90 top
J38  USB C  [USB-C-16P-4LAYER-ISOLATED]  88.39,78.49 0 top
J39  THING_PLUS  [THING_PLUS]  76.96,72.14 0 top
J40  CORTEX_JTAG_DEBUG_PTH_NS  [2X5-PTH-1.27MM-NO_SILK]  83.06,100.2 270 top
J41  Qwiic  [JST04_1MM_RA]  11.94,144.27 270 top
J42  [JST-2-SMD]  10.41,152.65 90 top
J43  USB C  [USB-C-16P-4LAYER-ISOLATED]  18.29,141.22 0 top
J44  THING_PLUS  [THING_PLUS]  6.86,134.87 0 top
J45  CORTEX_JTAG_DEBUG_PTH_NS  [2X5-PTH-1.27MM-NO_SILK]  12.95,162.94 270 top
J46  Qwiic  [JST04_1MM_RA]  35.31,144.27 270 top
J47  [JST-2-SMD]  33.78,152.65 90 top
J48  USB C  [USB-C-16P-4LAYER-ISOLATED]  41.66,141.22 0 top
J49  THING_PLUS  [THING_PLUS]  30.23,134.87 0 top
J50  CORTEX_JTAG_DEBUG_PTH_NS  [2X5-PTH-1.27MM-NO_SILK]  36.32,162.94 270 top
J51  Qwiic  [JST04_1MM_RA]  58.67,144.27 270 top
J52  [JST-2-SMD]  57.15,152.65 90 top
J53  USB C  [USB-C-16P-4LAYER-ISOLATED]  65.02,141.22 0 top
J54  THING_PLUS  [THING_PLUS]  53.59,134.87 0 top
J55  CORTEX_JTAG_DEBUG_PTH_NS  [2X5-PTH-1.27MM-NO_SILK]  59.69,162.94 270 top
J56  Qwiic  [JST04_1MM_RA]  82.04,144.27 270 top
J57  [JST-2-SMD]  80.52,152.65 90 top
J58  USB C  [USB-C-16P-4LAYER-ISOLATED]  88.39,141.22 0 top
J59  THING_PLUS  [THING_PLUS]  76.96,134.87 0 top
J60  CORTEX_JTAG_DEBUG_PTH_NS  [2X5-PTH-1.27MM-NO_SILK]  83.06,162.94 270 top
LED  JUMPER-SMT_2_NC_TRACE_SILK  [SMT-JUMPER_2_NC_TRACE_SILK]  26.04,16.64 180 bottom
LED1  JUMPER-SMT_2_NC_TRACE_SILK  [SMT-JUMPER_2_NC_TRACE_SILK]  49.4,16.64 180 bottom
LED2  JUMPER-SMT_2_NC_TRACE_SILK  [SMT-JUMPER_2_NC_TRACE_SILK]  72.77,16.64 180 bottom
LED3  JUMPER-SMT_2_NC_TRACE_SILK  [SMT-JUMPER_2_NC_TRACE_SILK]  96.14,16.64 180 bottom
LED4  JUMPER-SMT_2_NC_TRACE_SILK  [SMT-JUMPER_2_NC_TRACE_SILK]  26.04,79.38 180 bottom
LED5  JUMPER-SMT_2_NC_TRACE_SILK  [SMT-JUMPER_2_NC_TRACE_SILK]  49.4,79.38 180 bottom
LED6  JUMPER-SMT_2_NC_TRACE_SILK  [SMT-JUMPER_2_NC_TRACE_SILK]  72.77,79.38 180 bottom
LED7  JUMPER-SMT_2_NC_TRACE_SILK  [SMT-JUMPER_2_NC_TRACE_SILK]  96.14,79.38 180 bottom
LED8  JUMPER-SMT_2_NC_TRACE_SILK  [SMT-JUMPER_2_NC_TRACE_SILK]  26.04,142.11 180 bottom
LED9  JUMPER-SMT_2_NC_TRACE_SILK  [SMT-JUMPER_2_NC_TRACE_SILK]  49.4,142.11 180 bottom
LED10  JUMPER-SMT_2_NC_TRACE_SILK  [SMT-JUMPER_2_NC_TRACE_SILK]  72.77,142.11 180 bottom
LED11  JUMPER-SMT_2_NC_TRACE_SILK  [SMT-JUMPER_2_NC_TRACE_SILK]  96.14,142.11 180 bottom
LOGO1  OSHW-LOGOS  [OSHW-LOGO-S]  9.4,15.11 0 bottom
LOGO2  SFE_LOGO_NAME_FLAME.1_INCH  [SFE_LOGO_NAME_FLAME_.1]  18.16,63.75 0 bottom
LOGO3  OSHW-LOGOS  [OSHW-LOGO-S]  32.77,15.11 0 bottom
LOGO4  SFE_LOGO_NAME_FLAME.1_INCH  [SFE_LOGO_NAME_FLAME_.1]  41.53,63.75 0 bottom
LOGO5  OSHW-LOGOS  [OSHW-LOGO-S]  56.13,15.11 0 bottom
LOGO6  SFE_LOGO_NAME_FLAME.1_INCH  [SFE_LOGO_NAME_FLAME_.1]  64.9,63.75 0 bottom
LOGO7  OSHW-LOGOS  [OSHW-LOGO-S]  79.5,15.11 0 bottom
LOGO8  SFE_LOGO_NAME_FLAME.1_INCH  [SFE_LOGO_NAME_FLAME_.1]  88.27,63.75 0 bottom
LOGO9  OSHW-LOGOS  [OSHW-LOGO-S]  9.4,77.85 0 bottom
LOGO10  SFE_LOGO_NAME_FLAME.1_INCH  [SFE_LOGO_NAME_FLAME_.1]  18.16,126.49 0 bottom
LOGO11  OSHW-LOGOS  [OSHW-LOGO-S]  32.77,77.85 0 bottom
LOGO12  SFE_LOGO_NAME_FLAME.1_INCH  [SFE_LOGO_NAME_FLAME_.1]  41.53,126.49 0 bottom
LOGO13  OSHW-LOGOS  [OSHW-LOGO-S]  56.13,77.85 0 bottom
LOGO14  SFE_LOGO_NAME_FLAME.1_INCH  [SFE_LOGO_NAME_FLAME_.1]  64.9,126.49 0 bottom
LOGO15  OSHW-LOGOS  [OSHW-LOGO-S]  79.5,77.85 0 bottom
LOGO16  SFE_LOGO_NAME_FLAME.1_INCH  [SFE_LOGO_NAME_FLAME_.1]  88.27,126.49 0 bottom
LOGO17  OSHW-LOGOS  [OSHW-LOGO-S]  9.4,140.59 0 bottom
LOGO18  SFE_LOGO_NAME_FLAME.1_INCH  [SFE_LOGO_NAME_FLAME_.1]  18.16,189.23 0 bottom
LOGO19  OSHW-LOGOS  [OSHW-LOGO-S]  32.77,140.59 0 bottom
LOGO20  SFE_LOGO_NAME_FLAME.1_INCH  [SFE_LOGO_NAME_FLAME_.1]  41.53,189.23 0 bottom
LOGO21  OSHW-LOGOS  [OSHW-LOGO-S]  56.13,140.59 0 bottom
LOGO22  SFE_LOGO_NAME_FLAME.1_INCH  [SFE_LOGO_NAME_FLAME_.1]  64.9,189.23 0 bottom
LOGO23  OSHW-LOGOS  [OSHW-LOGO-S]  79.5,140.59 0 bottom
LOGO24  SFE_LOGO_NAME_FLAME.1_INCH  [SFE_LOGO_NAME_FLAME_.1]  88.27,189.23 0 bottom
MEAS  JUMPER-COMBO_2_NC_TRACE  [COMBO-JUMPER_2_NC_TRACE]  18.8,33.02 180 bottom
MEAS1  JUMPER-COMBO_2_NC_TRACE  [COMBO-JUMPER_2_NC_TRACE]  42.16,33.02 180 bottom
MEAS2  JUMPER-COMBO_2_NC_TRACE  [COMBO-JUMPER_2_NC_TRACE]  65.53,33.02 180 bottom
MEAS3  JUMPER-COMBO_2_NC_TRACE  [COMBO-JUMPER_2_NC_TRACE]  88.9,33.02 180 bottom
MEAS4  JUMPER-COMBO_2_NC_TRACE  [COMBO-JUMPER_2_NC_TRACE]  18.8,95.76 180 bottom
MEAS5  JUMPER-COMBO_2_NC_TRACE  [COMBO-JUMPER_2_NC_TRACE]  42.16,95.76 180 bottom
MEAS6  JUMPER-COMBO_2_NC_TRACE  [COMBO-JUMPER_2_NC_TRACE]  65.53,95.76 180 bottom
MEAS7  JUMPER-COMBO_2_NC_TRACE  [COMBO-JUMPER_2_NC_TRACE]  88.9,95.76 180 bottom
MEAS8  JUMPER-COMBO_2_NC_TRACE  [COMBO-JUMPER_2_NC_TRACE]  18.8,158.5 180 bottom
MEAS9  JUMPER-COMBO_2_NC_TRACE  [COMBO-JUMPER_2_NC_TRACE]  42.16,158.5 180 bottom
MEAS10  JUMPER-COMBO_2_NC_TRACE  [COMBO-JUMPER_2_NC_TRACE]  65.53,158.5 180 bottom
MEAS11  JUMPER-COMBO_2_NC_TRACE  [COMBO-JUMPER_2_NC_TRACE]  88.9,158.5 180 bottom
Q1  20V/4.2A/52mΩ/1.4W  [SOT23-3]  21.72,25.91 90 top
Q2  20V/4.2A/52mΩ/1.4W  [SOT23-3]  45.08,25.91 90 top
Q3  20V/4.2A/52mΩ/1.4W  [SOT23-3]  68.45,25.91 90 top
Q4  20V/4.2A/52mΩ/1.4W  [SOT23-3]  91.82,25.91 90 top
Q5  20V/4.2A/52mΩ/1.4W  [SOT23-3]  21.72,88.65 90 top
Q6  20V/4.2A/52mΩ/1.4W  [SOT23-3]  45.08,88.65 90 top
Q7  20V/4.2A/52mΩ/1.4W  [SOT23-3]  68.45,88.65 90 top
Q8  20V/4.2A/52mΩ/1.4W  [SOT23-3]  91.82,88.65 90 top
Q9  20V/4.2A/52mΩ/1.4W  [SOT23-3]  21.72,151.38 90 top
Q10  20V/4.2A/52mΩ/1.4W  [SOT23-3]  45.08,151.38 90 top
Q11  20V/4.2A/52mΩ/1.4W  [SOT23-3]  68.45,151.38 90 top
Q12  20V/4.2A/52mΩ/1.4W  [SOT23-3]  91.82,151.38 90 top
R1  5.1k  [0402-TIGHT]  16.51,16.51 180 top
R2  1k  [0402-TIGHT]  17.27,37.87 0 top
R3  1k  [0402-TIGHT]  17.27,41.27 180 top
R4  5.1k  [0402-TIGHT]  20.07,17.02 90 top
R5  4.7k  [0402-TIGHT]  11.68,42.42 0 top
R6  2.0K  [0402-TIGHT]  15.75,32.89 90 top
R7  4.7k  [0402-TIGHT]  14.35,42.42 180 top
R8  1k  [0402-TIGHT]  28.45,15.75 270 top
R9  2.2k  [0402-TIGHT]  38.99,20.19 90 top
R10  2.2k  [0402-TIGHT]  15.62,20.19 90 top
R11  27  [0402-TIGHT]  17.14,19.05 180 top
R12  27  [0402-TIGHT]  19.44,19.05 0 top
R13  10k  [0402-TIGHT]  26.54,23.12 90 top
R14  10k  [0402-TIGHT]  14.73,32.9 90 top
R15  10k  [0402-TIGHT]  24.77,23.62 180 top
R16  10k  [0402-TIGHT]  18.92,28.7 180 top
R17  2.2k  [0402-TIGHT]  14.61,20.19 90 top
R18  100  [0402-TIGHT]  22.23,23.62 0 top
R19  2.2k  [0402-TIGHT]  37.97,20.19 90 top
R20  10k  [0402-TIGHT]  26.67,52.32 90 top
R21  5.1k  [0402-TIGHT]  39.88,16.51 180 top
R22  5.1k  [0402-TIGHT]  43.43,17.02 90 top
R23  10k  [0402-TIGHT]  48.13,23.62 180 top
R24  10k  [0402-TIGHT]  42.29,28.7 180 top
R25  1k  [0402-TIGHT]  40.64,37.87 0 top
R26  1k  [0402-TIGHT]  40.64,41.27 180 top
R27  2.0K  [0402-TIGHT]  39.12,32.89 90 top
R28  1k  [0402-TIGHT]  51.82,15.75 270 top
R29  4.7k  [0402-TIGHT]  35.05,42.42 0 top
R30  4.7k  [0402-TIGHT]  37.72,42.42 180 top
R31  27  [0402-TIGHT]  40.5,19.05 180 top
R32  27  [0402-TIGHT]  42.81,19.05 0 top
R33  10k  [0402-TIGHT]  49.91,23.12 90 top
R34  10k  [0402-TIGHT]  38.1,32.9 90 top
R35  100  [0402-TIGHT]  45.6,23.62 0 top
R36  10k  [0402-TIGHT]  50.04,52.32 90 top
R37  2.2k  [0402-TIGHT]  62.36,20.19 90 top
R38  2.2k  [0402-TIGHT]  61.34,20.19 90 top
R39  5.1k  [0402-TIGHT]  63.25,16.51 180 top
R40  5.1k  [0402-TIGHT]  66.8,17.02 90 top
R41  10k  [0402-TIGHT]  71.5,23.62 180 top
R42  10k  [0402-TIGHT]  65.66,28.7 180 top
R43  1k  [0402-TIGHT]  64.01,37.87 0 top
R44  1k  [0402-TIGHT]  64.01,41.27 180 top
R45  2.0K  [0402-TIGHT]  62.48,32.89 90 top
R46  1k  [0402-TIGHT]  75.18,15.75 270 top
R47  4.7k  [0402-TIGHT]  58.42,42.42 0 top
R48  4.7k  [0402-TIGHT]  61.09,42.42 180 top
R49  27  [0402-TIGHT]  63.87,19.05 180 top
R50  27  [0402-TIGHT]  66.17,19.05 0 top
R51  10k  [0402-TIGHT]  73.28,23.12 90 top
R52  10k  [0402-TIGHT]  61.47,32.9 90 top
R53  100  [0402-TIGHT]  68.97,23.62 0 top
R54  10k  [0402-TIGHT]  73.41,52.32 90 top
R55  2.2k  [0402-TIGHT]  85.73,20.19 90 top
R56  2.2k  [0402-TIGHT]  84.71,20.19 90 top
R57  5.1k  [0402-TIGHT]  86.61,16.51 180 top
R58  5.1k  [0402-TIGHT]  90.17,17.02 90 top
R59  10k  [0402-TIGHT]  94.87,23.62 180 top
R60  10k  [0402-TIGHT]  89.03,28.7 180 top
R61  1k  [0402-TIGHT]  87.38,37.87 0 top
R62  1k  [0402-TIGHT]  87.38,41.27 180 top
R63  2.0K  [0402-TIGHT]  85.85,32.89 90 top
R64  1k  [0402-TIGHT]  98.55,15.75 270 top
R65  4.7k  [0402-TIGHT]  81.79,42.42 0 top
R66  4.7k  [0402-TIGHT]  84.45,42.42 180 top
R67  27  [0402-TIGHT]  87.24,19.05 180 top
R68  27  [0402-TIGHT]  89.54,19.05 0 top
R69  10k  [0402-TIGHT]  96.65,23.12 90 top
R70  10k  [0402-TIGHT]  84.84,32.9 90 top
R71  100  [0402-TIGHT]  92.34,23.62 0 top
R72  10k  [0402-TIGHT]  96.77,52.32 90 top
R73  2.2k  [0402-TIGHT]  15.62,82.93 90 top
R74  2.2k  [0402-TIGHT]  14.61,82.93 90 top
R75  5.1k  [0402-TIGHT]  16.51,79.25 180 top
R76  5.1k  [0402-TIGHT]  20.07,79.76 90 top
R77  10k  [0402-TIGHT]  24.77,86.36 180 top
R78  10k  [0402-TIGHT]  18.92,91.44 180 top
R79  1k  [0402-TIGHT]  17.27,100.61 0 top
R80  1k  [0402-TIGHT]  17.27,104.01 180 top
R81  2.0K  [0402-TIGHT]  15.75,95.63 90 top
R82  1k  [0402-TIGHT]  28.45,78.49 270 top
R83  4.7k  [0402-TIGHT]  11.68,105.16 0 top
R84  4.7k  [0402-TIGHT]  14.35,105.16 180 top
R85  27  [0402-TIGHT]  17.14,81.79 180 top
R86  27  [0402-TIGHT]  19.44,81.79 0 top
R87  10k  [0402-TIGHT]  26.54,85.86 90 top
R88  10k  [0402-TIGHT]  14.73,95.64 90 top
R89  100  [0402-TIGHT]  22.23,86.36 0 top
R90  10k  [0402-TIGHT]  26.67,115.06 90 top
R91  2.2k  [0402-TIGHT]  38.99,82.93 90 top
R92  2.2k  [0402-TIGHT]  37.97,82.93 90 top
R93  5.1k  [0402-TIGHT]  39.88,79.25 180 top
R94  5.1k  [0402-TIGHT]  43.43,79.76 90 top
R95  10k  [0402-TIGHT]  48.13,86.36 180 top
R96  10k  [0402-TIGHT]  42.29,91.44 180 top
R97  1k  [0402-TIGHT]  40.64,100.61 0 top
R98  1k  [0402-TIGHT]  40.64,104.01 180 top
R99  2.0K  [0402-TIGHT]  39.12,95.63 90 top
R100  1k  [0402-TIGHT]  51.82,78.49 270 top
R101  4.7k  [0402-TIGHT]  35.05,105.16 0 top
R102  4.7k  [0402-TIGHT]  37.72,105.16 180 top
R103  27  [0402-TIGHT]  40.5,81.79 180 top
R104  27  [0402-TIGHT]  42.81,81.79 0 top
R105  10k  [0402-TIGHT]  49.91,85.86 90 top
R106  10k  [0402-TIGHT]  38.1,95.64 90 top
R107  100  [0402-TIGHT]  45.6,86.36 0 top
R108  10k  [0402-TIGHT]  50.04,115.06 90 top
R109  2.2k  [0402-TIGHT]  62.36,82.93 90 top
R110  2.2k  [0402-TIGHT]  61.34,82.93 90 top
R111  5.1k  [0402-TIGHT]  63.25,79.25 180 top
R112  5.1k  [0402-TIGHT]  66.8,79.76 90 top
R113  10k  [0402-TIGHT]  71.5,86.36 180 top
R114  10k  [0402-TIGHT]  65.66,91.44 180 top
R115  1k  [0402-TIGHT]  64.01,100.61 0 top
R116  1k  [0402-TIGHT]  64.01,104.01 180 top
R117  2.0K  [0402-TIGHT]  62.48,95.63 90 top
R118  1k  [0402-TIGHT]  75.18,78.49 270 top
R119  4.7k  [0402-TIGHT]  58.42,105.16 0 top
R120  4.7k  [0402-TIGHT]  61.09,105.16 180 top
R121  27  [0402-TIGHT]  63.87,81.79 180 top
R122  27  [0402-TIGHT]  66.17,81.79 0 top
R123  10k  [0402-TIGHT]  73.28,85.86 90 top
R124  10k  [0402-TIGHT]  61.47,95.64 90 top
R125  100  [0402-TIGHT]  68.97,86.36 0 top
R126  10k  [0402-TIGHT]  73.41,115.06 90 top
R127  2.2k  [0402-TIGHT]  85.73,82.93 90 top
R128  2.2k  [0402-TIGHT]  84.71,82.93 90 top
R129  5.1k  [0402-TIGHT]  86.61,79.25 180 top
R130  5.1k  [0402-TIGHT]  90.17,79.76 90 top
R131  10k  [0402-TIGHT]  94.87,86.36 180 top
R132  10k  [0402-TIGHT]  89.03,91.44 180 top
R133  1k  [0402-TIGHT]  87.38,100.61 0 top
R134  1k  [0402-TIGHT]  87.38,104.01 180 top
R135  2.0K  [0402-TIGHT]  85.85,95.63 90 top
R136  1k  [0402-TIGHT]  98.55,78.49 270 top
R137  4.7k  [0402-TIGHT]  81.79,105.16 0 top
R138  4.7k  [0402-TIGHT]  84.45,105.16 180 top
R139  27  [0402-TIGHT]  87.24,81.79 180 top
R140  27  [0402-TIGHT]  89.54,81.79 0 top
R141  10k  [0402-TIGHT]  96.65,85.86 90 top
R142  10k  [0402-TIGHT]  84.84,95.64 90 top
R143  100  [0402-TIGHT]  92.34,86.36 0 top
R144  10k  [0402-TIGHT]  96.77,115.06 90 top
R145  2.2k  [0402-TIGHT]  15.62,145.67 90 top
R146  2.2k  [0402-TIGHT]  14.61,145.67 90 top
R147  5.1k  [0402-TIGHT]  16.51,141.99 180 top
R148  5.1k  [0402-TIGHT]  20.07,142.49 90 top
R149  10k  [0402-TIGHT]  24.77,149.1 180 top
R150  10k  [0402-TIGHT]  18.92,154.18 180 top
R151  1k  [0402-TIGHT]  17.27,163.35 0 top
R152  1k  [0402-TIGHT]  17.27,166.75 180 top
R153  2.0K  [0402-TIGHT]  15.75,158.37 90 top
R154  1k  [0402-TIGHT]  28.45,141.22 270 top
R155  4.7k  [0402-TIGHT]  11.68,167.89 0 top
R156  4.7k  [0402-TIGHT]  14.35,167.89 180 top
R157  27  [0402-TIGHT]  17.14,144.53 180 top
R158  27  [0402-TIGHT]  19.44,144.53 0 top
R159  10k  [0402-TIGHT]  26.54,148.6 90 top
R160  10k  [0402-TIGHT]  14.73,158.38 90 top
R161  100  [0402-TIGHT]  22.23,149.1 0 top
R162  10k  [0402-TIGHT]  26.67,177.8 90 top
R163  2.2k  [0402-TIGHT]  38.99,145.67 90 top
R164  2.2k  [0402-TIGHT]  37.97,145.67 90 top
R165  5.1k  [0402-TIGHT]  39.88,141.99 180 top
R166  5.1k  [0402-TIGHT]  43.43,142.49 90 top
R167  10k  [0402-TIGHT]  48.13,149.1 180 top
R168  10k  [0402-TIGHT]  42.29,154.18 180 top
R169  1k  [0402-TIGHT]  40.64,163.35 0 top
R170  1k  [0402-TIGHT]  40.64,166.75 180 top
R171  2.0K  [0402-TIGHT]  39.12,158.37 90 top
R172  1k  [0402-TIGHT]  51.82,141.22 270 top
R173  4.7k  [0402-TIGHT]  35.05,167.89 0 top
R174  4.7k  [0402-TIGHT]  37.72,167.89 180 top
R175  27  [0402-TIGHT]  40.5,144.53 180 top
R176  27  [0402-TIGHT]  42.81,144.53 0 top
R177  10k  [0402-TIGHT]  49.91,148.6 90 top
R178  10k  [0402-TIGHT]  38.1,158.38 90 top
R179  100  [0402-TIGHT]  45.6,149.1 0 top
R180  10k  [0402-TIGHT]  50.04,177.8 90 top
R181  2.2k  [0402-TIGHT]  62.36,145.67 90 top
R182  2.2k  [0402-TIGHT]  61.34,145.67 90 top
R183  5.1k  [0402-TIGHT]  63.25,141.99 180 top
R184  5.1k  [0402-TIGHT]  66.8,142.49 90 top
R185  10k  [0402-TIGHT]  71.5,149.1 180 top
R186  10k  [0402-TIGHT]  65.66,154.18 180 top
R187  1k  [0402-TIGHT]  64.01,163.35 0 top
R188  1k  [0402-TIGHT]  64.01,166.75 180 top
R189  2.0K  [0402-TIGHT]  62.48,158.37 90 top
R190  1k  [0402-TIGHT]  75.18,141.22 270 top
R191  4.7k  [0402-TIGHT]  58.42,167.89 0 top
R192  4.7k  [0402-TIGHT]  61.09,167.89 180 top
R193  27  [0402-TIGHT]  63.87,144.53 180 top
R194  27  [0402-TIGHT]  66.17,144.53 0 top
R195  10k  [0402-TIGHT]  73.28,148.6 90 top
R196  10k  [0402-TIGHT]  61.47,158.38 90 top
R197  100  [0402-TIGHT]  68.97,149.1 0 top
R198  10k  [0402-TIGHT]  73.41,177.8 90 top
R199  2.2k  [0402-TIGHT]  85.73,145.67 90 top
R200  2.2k  [0402-TIGHT]  84.71,145.67 90 top
R201  5.1k  [0402-TIGHT]  86.61,141.99 180 top
R202  5.1k  [0402-TIGHT]  90.17,142.49 90 top
R203  10k  [0402-TIGHT]  94.87,149.1 180 top
R204  10k  [0402-TIGHT]  89.03,154.18 180 top
R205  1k  [0402-TIGHT]  87.38,163.35 0 top
R206  1k  [0402-TIGHT]  87.38,166.75 180 top
R207  2.0K  [0402-TIGHT]  85.85,158.37 90 top
R208  1k  [0402-TIGHT]  98.55,141.22 270 top
R209  4.7k  [0402-TIGHT]  81.79,167.89 0 top
R210  4.7k  [0402-TIGHT]  84.45,167.89 180 top
R211  27  [0402-TIGHT]  87.24,144.53 180 top
R212  27  [0402-TIGHT]  89.54,144.53 0 top
R213  10k  [0402-TIGHT]  96.65,148.6 90 top
R214  10k  [0402-TIGHT]  84.84,158.38 90 top
R215  100  [0402-TIGHT]  92.34,149.1 0 top
R216  10k  [0402-TIGHT]  96.77,177.8 90 top
RST  JUMPER-SMT_2_NC_TRACE_SILK  [SMT-JUMPER_2_NC_TRACE_SILK]  20.83,46.23 90 bottom
RST1  JUMPER-SMT_2_NC_TRACE_SILK  [SMT-JUMPER_2_NC_TRACE_SILK]  44.2,46.23 90 bottom
RST2  JUMPER-SMT_2_NC_TRACE_SILK  [SMT-JUMPER_2_NC_TRACE_SILK]  67.56,46.23 90 bottom
RST3  JUMPER-SMT_2_NC_TRACE_SILK  [SMT-JUMPER_2_NC_TRACE_SILK]  90.93,46.23 90 bottom
RST4  JUMPER-SMT_2_NC_TRACE_SILK  [SMT-JUMPER_2_NC_TRACE_SILK]  20.83,108.97 90 bottom
RST5  JUMPER-SMT_2_NC_TRACE_SILK  [SMT-JUMPER_2_NC_TRACE_SILK]  44.2,108.97 90 bottom
RST6  JUMPER-SMT_2_NC_TRACE_SILK  [SMT-JUMPER_2_NC_TRACE_SILK]  67.56,108.97 90 bottom
RST7  JUMPER-SMT_2_NC_TRACE_SILK  [SMT-JUMPER_2_NC_TRACE_SILK]  90.93,108.97 90 bottom
RST8  JUMPER-SMT_2_NC_TRACE_SILK  [SMT-JUMPER_2_NC_TRACE_SILK]  20.83,171.7 90 bottom
RST9  JUMPER-SMT_2_NC_TRACE_SILK  [SMT-JUMPER_2_NC_TRACE_SILK]  44.2,171.7 90 bottom
RST10  JUMPER-SMT_2_NC_TRACE_SILK  [SMT-JUMPER_2_NC_TRACE_SILK]  67.56,171.7 90 bottom
RST11  JUMPER-SMT_2_NC_TRACE_SILK  [SMT-JUMPER_2_NC_TRACE_SILK]  90.93,171.7 90 bottom
S1  [SWITCH_DPDT_SMD_AYZ0202]  23.62,41.4 90 top
S2  MOMENTARY-SWITCH-SPST-SMD-5.2MM-TALL  [TACTILE_SWITCH_SMD_5.2MM]  25.78,19.56 180 top
S3  MOMENTARY-SWITCH-SPST-SMD-5.2MM-TALL  [TACTILE_SWITCH_SMD_5.2MM]  49.15,19.56 180 top
S4  [SWITCH_DPDT_SMD_AYZ0202]  46.99,41.4 90 top
S5  MOMENTARY-SWITCH-SPST-SMD-5.2MM-TALL  [TACTILE_SWITCH_SMD_5.2MM]  72.52,19.56 180 top
S6  [SWITCH_DPDT_SMD_AYZ0202]  70.36,41.4 90 top
S7  MOMENTARY-SWITCH-SPST-SMD-5.2MM-TALL  [TACTILE_SWITCH_SMD_5.2MM]  95.89,19.56 180 top
S8  [SWITCH_DPDT_SMD_AYZ0202]  93.73,41.4 90 top
S9  MOMENTARY-SWITCH-SPST-SMD-5.2MM-TALL  [TACTILE_SWITCH_SMD_5.2MM]  25.78,82.3 180 top
S10  [SWITCH_DPDT_SMD_AYZ0202]  23.62,104.14 90 top
S11  MOMENTARY-SWITCH-SPST-SMD-5.2MM-TALL  [TACTILE_SWITCH_SMD_5.2MM]  49.15,82.3 180 top
S12  [SWITCH_DPDT_SMD_AYZ0202]  46.99,104.14 90 top
S13  MOMENTARY-SWITCH-SPST-SMD-5.2MM-TALL  [TACTILE_SWITCH_SMD_5.2MM]  72.52,82.3 180 top
S14  [SWITCH_DPDT_SMD_AYZ0202]  70.36,104.14 90 top
S15  MOMENTARY-SWITCH-SPST-SMD-5.2MM-TALL  [TACTILE_SWITCH_SMD_5.2MM]  95.89,82.3 180 top
S16  [SWITCH_DPDT_SMD_AYZ0202]  93.73,104.14 90 top
S17  MOMENTARY-SWITCH-SPST-SMD-5.2MM-TALL  [TACTILE_SWITCH_SMD_5.2MM]  25.78,145.03 180 top
S18  [SWITCH_DPDT_SMD_AYZ0202]  23.62,166.88 90 top
S19  MOMENTARY-SWITCH-SPST-SMD-5.2MM-TALL  [TACTILE_SWITCH_SMD_5.2MM]  49.15,145.03 180 top
S20  [SWITCH_DPDT_SMD_AYZ0202]  46.99,166.88 90 top
S21  MOMENTARY-SWITCH-SPST-SMD-5.2MM-TALL  [TACTILE_SWITCH_SMD_5.2MM]  72.52,145.03 180 top
S22  [SWITCH_DPDT_SMD_AYZ0202]  70.36,166.88 90 top
S23  MOMENTARY-SWITCH-SPST-SMD-5.2MM-TALL  [TACTILE_SWITCH_SMD_5.2MM]  95.89,145.03 180 top
S24  [SWITCH_DPDT_SMD_AYZ0202]  93.73,166.88 90 top
SHLD  JUMPER-SMT_2_NC_TRACE_SILK  [SMT-JUMPER_2_NC_TRACE_SILK]  13.97,12.45 180 bottom
SHLD1  JUMPER-SMT_2_NC_TRACE_SILK  [SMT-JUMPER_2_NC_TRACE_SILK]  37.34,12.45 180 bottom
SHLD2  JUMPER-SMT_2_NC_TRACE_SILK  [SMT-JUMPER_2_NC_TRACE_SILK]  60.71,12.45 180 bottom
SHLD3  JUMPER-SMT_2_NC_TRACE_SILK  [SMT-JUMPER_2_NC_TRACE_SILK]  84.07,12.45 180 bottom
SHLD4  JUMPER-SMT_2_NC_TRACE_SILK  [SMT-JUMPER_2_NC_TRACE_SILK]  13.97,75.18 180 bottom
SHLD5  JUMPER-SMT_2_NC_TRACE_SILK  [SMT-JUMPER_2_NC_TRACE_SILK]  37.34,75.18 180 bottom
SHLD6  JUMPER-SMT_2_NC_TRACE_SILK  [SMT-JUMPER_2_NC_TRACE_SILK]  60.71,75.18 180 bottom
SHLD7  JUMPER-SMT_2_NC_TRACE_SILK  [SMT-JUMPER_2_NC_TRACE_SILK]  84.07,75.18 180 bottom
SHLD8  JUMPER-SMT_2_NC_TRACE_SILK  [SMT-JUMPER_2_NC_TRACE_SILK]  13.97,137.92 180 bottom
SHLD9  JUMPER-SMT_2_NC_TRACE_SILK  [SMT-JUMPER_2_NC_TRACE_SILK]  37.34,137.92 180 bottom
SHLD10  JUMPER-SMT_2_NC_TRACE_SILK  [SMT-JUMPER_2_NC_TRACE_SILK]  60.71,137.92 180 bottom
SHLD11  JUMPER-SMT_2_NC_TRACE_SILK  [SMT-JUMPER_2_NC_TRACE_SILK]  84.07,137.92 180 bottom
TMS  TEST-POINT3  [PAD.03X.03]  14.48,43.69 0 bottom
TMS1  TEST-POINT3  [PAD.03X.03]  37.85,43.69 0 bottom
TMS2  TEST-POINT3  [PAD.03X.03]  61.21,43.69 0 bottom
TMS3  TEST-POINT3  [PAD.03X.03]  84.58,43.69 0 bottom
TMS4  TEST-POINT3  [PAD.03X.03]  14.48,106.43 0 bottom
TMS5  TEST-POINT3  [PAD.03X.03]  37.85,106.43 0 bottom
TMS6  TEST-POINT3  [PAD.03X.03]  61.21,106.43 0 bottom
TMS7  TEST-POINT3  [PAD.03X.03]  84.58,106.43 0 bottom
TMS8  TEST-POINT3  [PAD.03X.03]  14.48,169.16 0 bottom
TMS9  TEST-POINT3  [PAD.03X.03]  37.85,169.16 0 bottom
TMS10  TEST-POINT3  [PAD.03X.03]  61.21,169.16 0 bottom
TMS11  TEST-POINT3  [PAD.03X.03]  84.58,169.16 0 bottom
U1  DA16200MOD  [XCVR_DA16200MOD-AAC4WA32]  18.29,57.66 0 top
U2  CH340E_MSOP10  [MSOP10]  18.41,22.86 90 top
U3  MCP73831  [SOT23-5]  23.24,35.05 90 top
U4  XC6222B331MR-G  [SOT23-5]  45.47,29.72 270 top
U5  MCP73831  [SOT23-5]  46.61,35.05 90 top
U6  DA16200MOD  [XCVR_DA16200MOD-AAC4WA32]  41.66,57.66 0 top
U7  XC6222B331MR-G  [SOT23-5]  22.1,29.72 270 top
U8  CH340E_MSOP10  [MSOP10]  41.78,22.86 90 top
U9  XC6222B331MR-G  [SOT23-5]  68.83,29.72 270 top
U10  MCP73831  [SOT23-5]  69.98,35.05 90 top
U11  DA16200MOD  [XCVR_DA16200MOD-AAC4WA32]  65.02,57.66 0 top
U12  CH340E_MSOP10  [MSOP10]  65.15,22.86 90 top
U13  XC6222B331MR-G  [SOT23-5]  92.2,29.72 270 top
U14  MCP73831  [SOT23-5]  93.34,35.05 90 top
U15  DA16200MOD  [XCVR_DA16200MOD-AAC4WA32]  88.39,57.66 0 top
U16  CH340E_MSOP10  [MSOP10]  88.52,22.86 90 top
U17  XC6222B331MR-G  [SOT23-5]  22.1,92.46 270 top
U18  MCP73831  [SOT23-5]  23.24,97.79 90 top
U19  DA16200MOD  [XCVR_DA16200MOD-AAC4WA32]  18.29,120.4 0 top
U20  CH340E_MSOP10  [MSOP10]  18.41,85.6 90 top
U21  XC6222B331MR-G  [SOT23-5]  45.47,92.46 270 top
U22  MCP73831  [SOT23-5]  46.61,97.79 90 top
U23  DA16200MOD  [XCVR_DA16200MOD-AAC4WA32]  41.66,120.4 0 top
U24  CH340E_MSOP10  [MSOP10]  41.78,85.6 90 top
U25  XC6222B331MR-G  [SOT23-5]  68.83,92.46 270 top
U26  MCP73831  [SOT23-5]  69.98,97.79 90 top
U27  DA16200MOD  [XCVR_DA16200MOD-AAC4WA32]  65.02,120.4 0 top
U28  CH340E_MSOP10  [MSOP10]  65.15,85.6 90 top
U29  XC6222B331MR-G  [SOT23-5]  92.2,92.46 270 top
U30  MCP73831  [SOT23-5]  93.34,97.79 90 top
U31  DA16200MOD  [XCVR_DA16200MOD-AAC4WA32]  88.39,120.4 0 top
U32  CH340E_MSOP10  [MSOP10]  88.52,85.6 90 top
U33  XC6222B331MR-G  [SOT23-5]  22.1,155.19 270 top
U34  MCP73831  [SOT23-5]  23.24,160.53 90 top
U35  DA16200MOD  [XCVR_DA16200MOD-AAC4WA32]  18.29,183.13 0 top
U36  CH340E_MSOP10  [MSOP10]  18.41,148.34 90 top
U37  XC6222B331MR-G  [SOT23-5]  45.47,155.19 270 top
U38  MCP73831  [SOT23-5]  46.61,160.53 90 top
U39  DA16200MOD  [XCVR_DA16200MOD-AAC4WA32]  41.66,183.13 0 top
U40  CH340E_MSOP10  [MSOP10]  41.78,148.34 90 top
U41  XC6222B331MR-G  [SOT23-5]  68.83,155.19 270 top
U42  MCP73831  [SOT23-5]  69.98,160.53 90 top
U43  DA16200MOD  [XCVR_DA16200MOD-AAC4WA32]  65.02,183.13 0 top
U44  CH340E_MSOP10  [MSOP10]  65.15,148.34 90 top
U45  XC6222B331MR-G  [SOT23-5]  92.2,155.19 270 top
U46  MCP73831  [SOT23-5]  93.34,160.53 90 top
U47  DA16200MOD  [XCVR_DA16200MOD-AAC4WA32]  88.39,183.13 0 top
U48  CH340E_MSOP10  [MSOP10]  88.52,148.34 90 top
U$1  [STAT0]  14.99,43.69 0 top
U$2  [CHG0]  15.49,40.26 0 top
U$3  [#MEAS_#0]  24.77,33.02 0 bottom
U$4  [G0]  25.27,45.21 0 top
U$5  [##RST##0]  28.07,23.37 0 bottom
U$6  [#VU#0]  11.94,38.61 0 bottom
U$7  [#IOA10#0]  14.1,53.85 0 bottom
U$8  [#MEAS#0]  16.76,34.8 0 top
U$9  [3V0]  24.89,37.59 0 top
U$10  [#CH340#0]  27.56,20.83 0 bottom
U$11  [#0#SDA#0]  14.61,61.47 0 bottom
U$12  [#1#SCL#0]  14.1,58.93 0 bottom
U$13  [IOA7_0]  21.46,17.27 90 top
U$14  [#NC#0]  28.07,41.15 0 bottom
U$15  [#NC#0]  28.07,38.61 0 bottom
U$16  [PWR0]  25.91,14.48 0 top
U$17  [#DA#0]  20.07,49.91 0 bottom
U$18  [#NC#0]  28.07,36.07 0 bottom
U$19  [#NC#0]  28.07,33.53 0 bottom
U$20  [#NC#0]  28.07,28.45 0 bottom
U$21  [5000]  24.38,35.56 0 bottom
U$22  [1000]  24.26,37.59 0 bottom
U$23  [MA0]  24.13,34.42 0 bottom
U$24  [SDA0]  9.78,59.69 90 top
U$25  [SCL0]  9.78,57.28 90 top
U$26  [#CSB#0]  9.65,54.61 90 top
U$27  [#4#TXO#0]  28.07,58.93 0 bottom
U$28  [110]  9.78,50.29 90 top
U$29  [#MEAS#0]  20.95,48.64 0 bottom
U$30  [#VBAT#0]  14.22,33.53 0 bottom
U$31  [QWIIC_4MM]  36.83,18.8 90 top
U$32  [100]  9.78,52.7 90 top
U$33  [RTC0]  9.78,47.24 90 top
U$34  [WK10]  9.78,44.58 90 top
U$35  [WK20]  9.78,41.91 90 top
U$36  [#5#RXI#0]  28.07,56.39 0 bottom
U$37  [EN0]  9.78,34.8 90 top
U$38  [VUSB0]  9.78,36.58 90 top
U$39  [VBAT0]  9.78,30.99 90 top
U$40  [#NC#0]  28.07,61.47 0 bottom
U$41  [TX0]  26.8,57.66 90 top
U$42  [RX0]  26.8,55.12 90 top
U$43  [##RST##0]  20.19,46.23 0 bottom
U$44  [90]  26.8,53.09 90 top
U$45  [80]  26.8,50.29 90 top
U$46  [PWR0]  49.28,14.48 0 top
U$47  [70]  26.8,48.13 90 top
U$48  [#GND#0]  51.43,30.99 0 bottom
U$49  [#3V3#0]  51.43,25.91 0 bottom
U$50  [#GND#0]  28.07,30.99 0 bottom
U$51  [#3V3#0]  28.07,25.91 0 bottom
U$52  [#EN#0]  35.18,36.07 0 bottom
U$53  [#EN#0]  11.81,36.07 0 bottom
U$54  [#IOC6#0]  36.58,41.15 0 bottom
U$55  [GND0]  26.8,29.59 90 top
U$56  [THING_PLUS0]  23.11,43.94 0 bottom
U$57  [3V30]  26.8,24.51 90 top
U$58  [#WK2#0]  36.58,43.69 0 bottom
U$59  [#CHG#0]  22.1,39.24 0 bottom
U$60  [#IOC6#0]  13.21,41.15 0 bottom
U$61  [#WK1#0]  36.2,46.23 0 bottom
U$62  [#6##CSB##0]  14.35,56.39 0 bottom
U$63  [#11#LED#0]  14.86,51.31 0 bottom
U$64  [QWIIC_4MM]  13.46,18.8 90 top
U$65  [C60]  9.78,40 90 top
U$66  [#9#POCI#0]  28.07,53.85 0 bottom
U$67  [#8#PICO#0]  28.07,51.31 0 bottom
U$68  [#7#SCLK#0]  28.19,48.77 0 bottom
U$69  [#2#A2#0]  28.07,46.23 0 bottom
U$70  [#3#A3#0]  28.07,43.69 0 bottom
U$71  [#WK2#0]  13.21,43.69 0 bottom
U$72  [#WK1#0]  12.83,46.23 0 bottom
U$73  [#RTC#0]  12.83,48.77 0 bottom
U$74  [#RTC#0]  36.2,48.77 0 bottom
U$75  [THING_PLUS0]  46.48,43.94 0 bottom
U$76  [DA162000]  45.72,42.04 0 bottom
U$77  [DA162000]  37.08,45.34 0 top
U$78  [#I�C#0]  40.51,24.51 0 bottom
U$79  [#LED#0]  48.51,16.64 0 bottom
U$80  [DA162000]  22.35,42.04 0 bottom
U$81  [DA162000]  13.72,45.34 0 top
U$82  [#I�C#0]  17.14,24.51 0 bottom
U$83  [#SHLD#0]  43.43,12.32 0 bottom
U$84  [#LED#0]  25.15,16.64 0 bottom
U$85  [#SHLD#0]  20.07,12.32 0 bottom
U$86  [STAT0]  38.35,43.69 0 top
U$87  [CHG0]  38.86,40.26 0 top
U$88  [##RST##0]  51.43,23.37 0 bottom
U$89  [#MEAS#0]  40.13,34.8 0 top
U$90  [#MEAS_#0]  48.13,33.02 0 bottom
U$91  [G0]  48.64,45.21 0 top
U$92  [3V0]  48.26,37.59 0 top
U$93  [IOA7_0]  44.83,17.27 90 top
U$94  [#VU#0]  35.31,38.61 0 bottom
U$95  [#NC#0]  51.43,41.15 0 bottom
U$96  [#NC#0]  51.43,38.61 0 bottom
U$97  [#NC#0]  51.43,36.07 0 bottom
U$98  [#NC#0]  51.43,33.53 0 bottom
U$99  [#NC#0]  51.43,28.45 0 bottom
U$100  [5000]  47.75,35.56 0 bottom
U$101  [1000]  47.62,37.59 0 bottom
U$102  [MA0]  47.5,34.42 0 bottom
U$103  [SDA0]  33.15,59.69 90 top
U$104  [SCL0]  33.15,57.28 90 top
U$105  [#CSB#0]  33.02,54.61 90 top
U$106  [100]  33.15,52.7 90 top
U$107  [RTC0]  33.15,47.24 90 top
U$108  [WK10]  33.15,44.58 90 top
U$109  [WK20]  33.15,41.91 90 top
U$110  [EN0]  33.15,34.8 90 top
U$111  [VUSB0]  33.15,36.58 90 top
U$112  [VBAT0]  33.15,30.99 90 top
U$113  [110]  33.15,50.29 90 top
U$114  [#NC#0]  51.43,61.47 0 bottom
U$115  [TX0]  50.16,57.66 90 top
U$116  [RX0]  50.16,55.12 90 top
U$117  [90]  50.16,53.09 90 top
U$118  [80]  50.16,50.29 90 top
U$119  [70]  50.16,48.13 90 top
U$120  [GND0]  50.16,29.59 90 top